# Altium PCB kernel.PcbDoc (part 1 of 7)
Units mil, origin at the board's own origin, x right, y up, seen from the top; angles counter-clockwise.
Board outline 2360 x 2450.34 mil, 6 copper layers (Top Layer, GND, SIGNAL, POWER, GND1, Bottom Layer), stack 32.112 mil thick; 150 components, 174 nets, 684 pads, 710 vias.
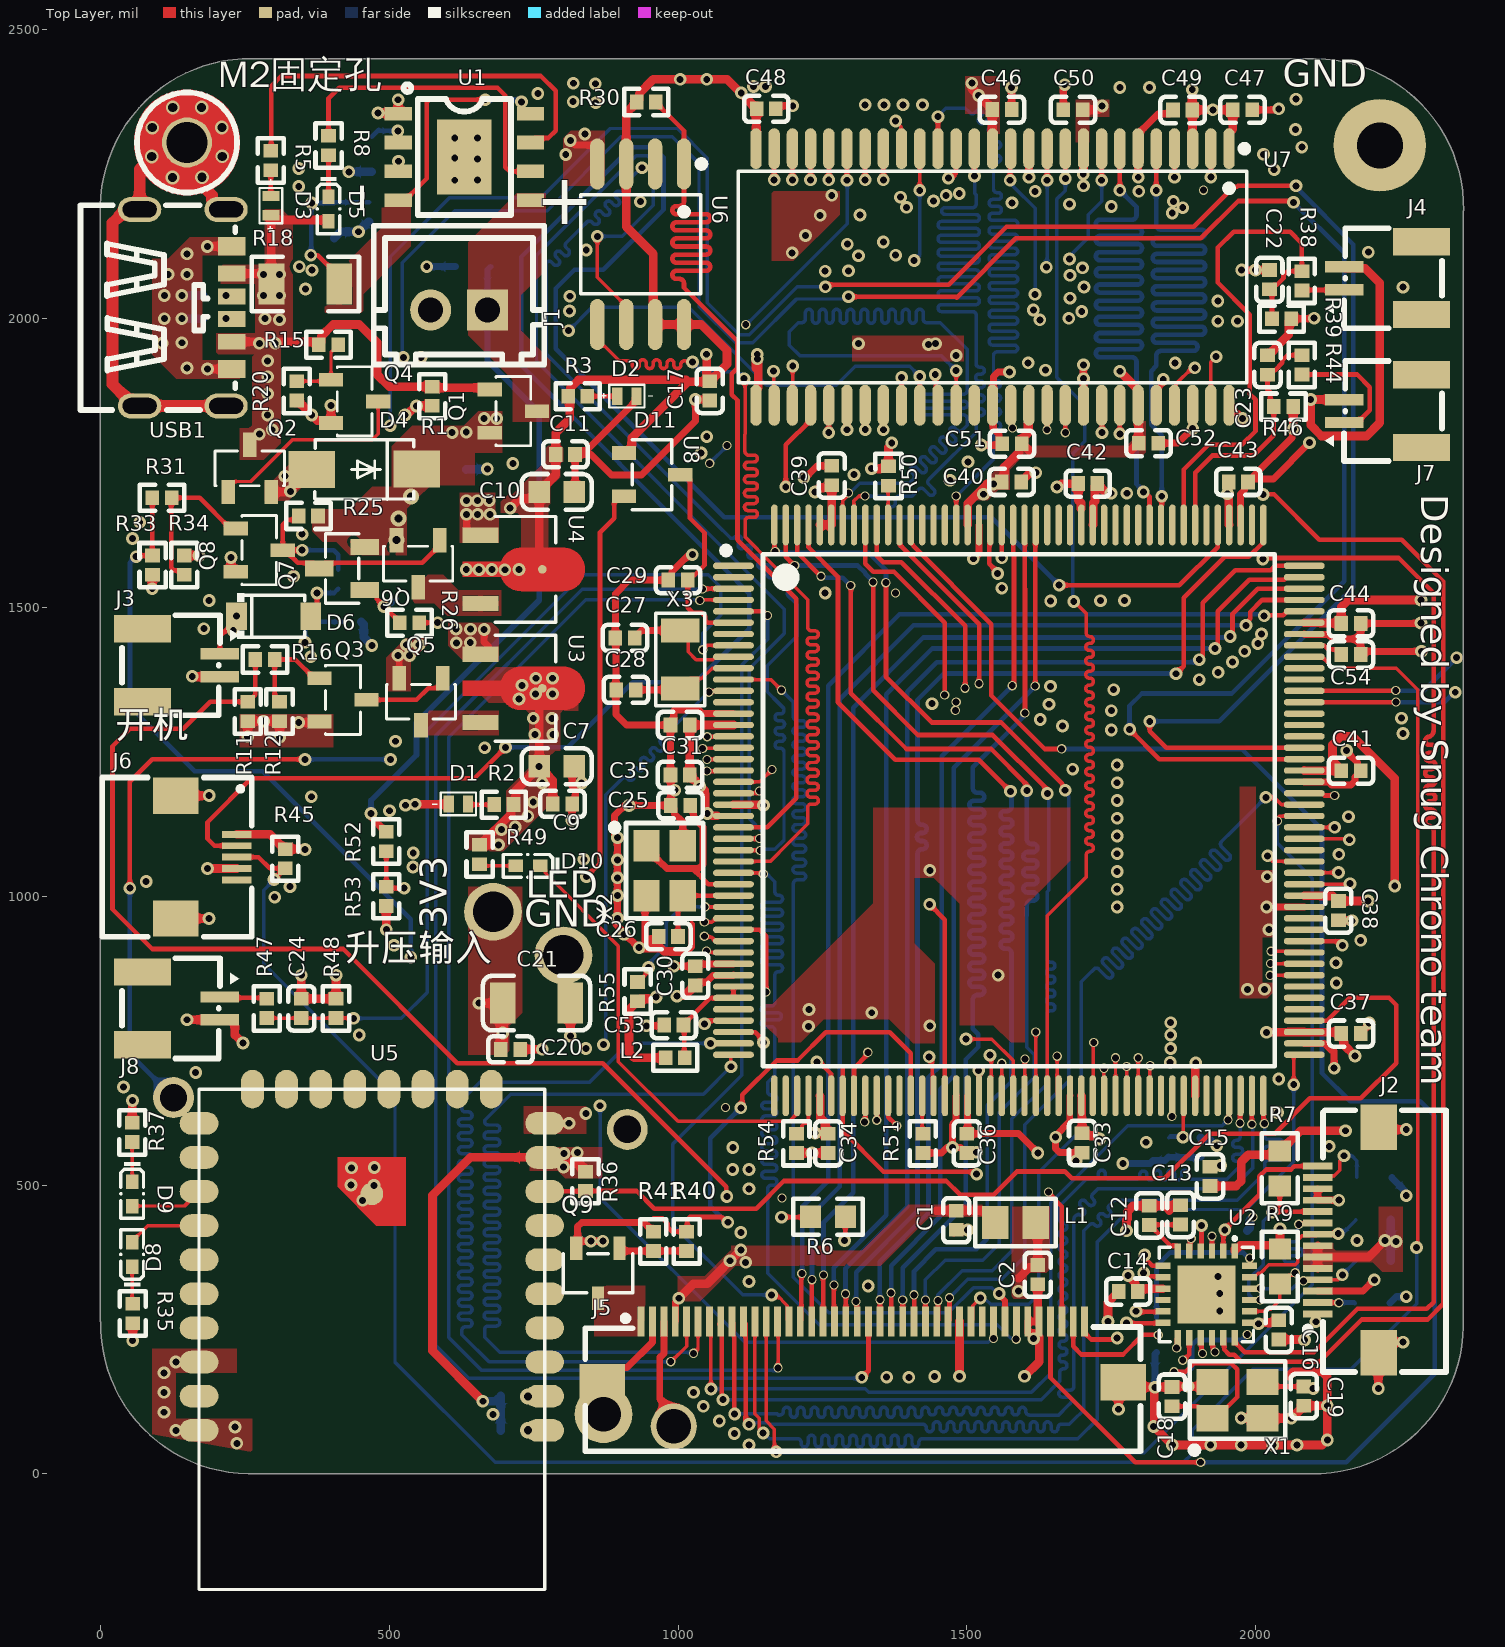
[diagram p0: Top Layer view]
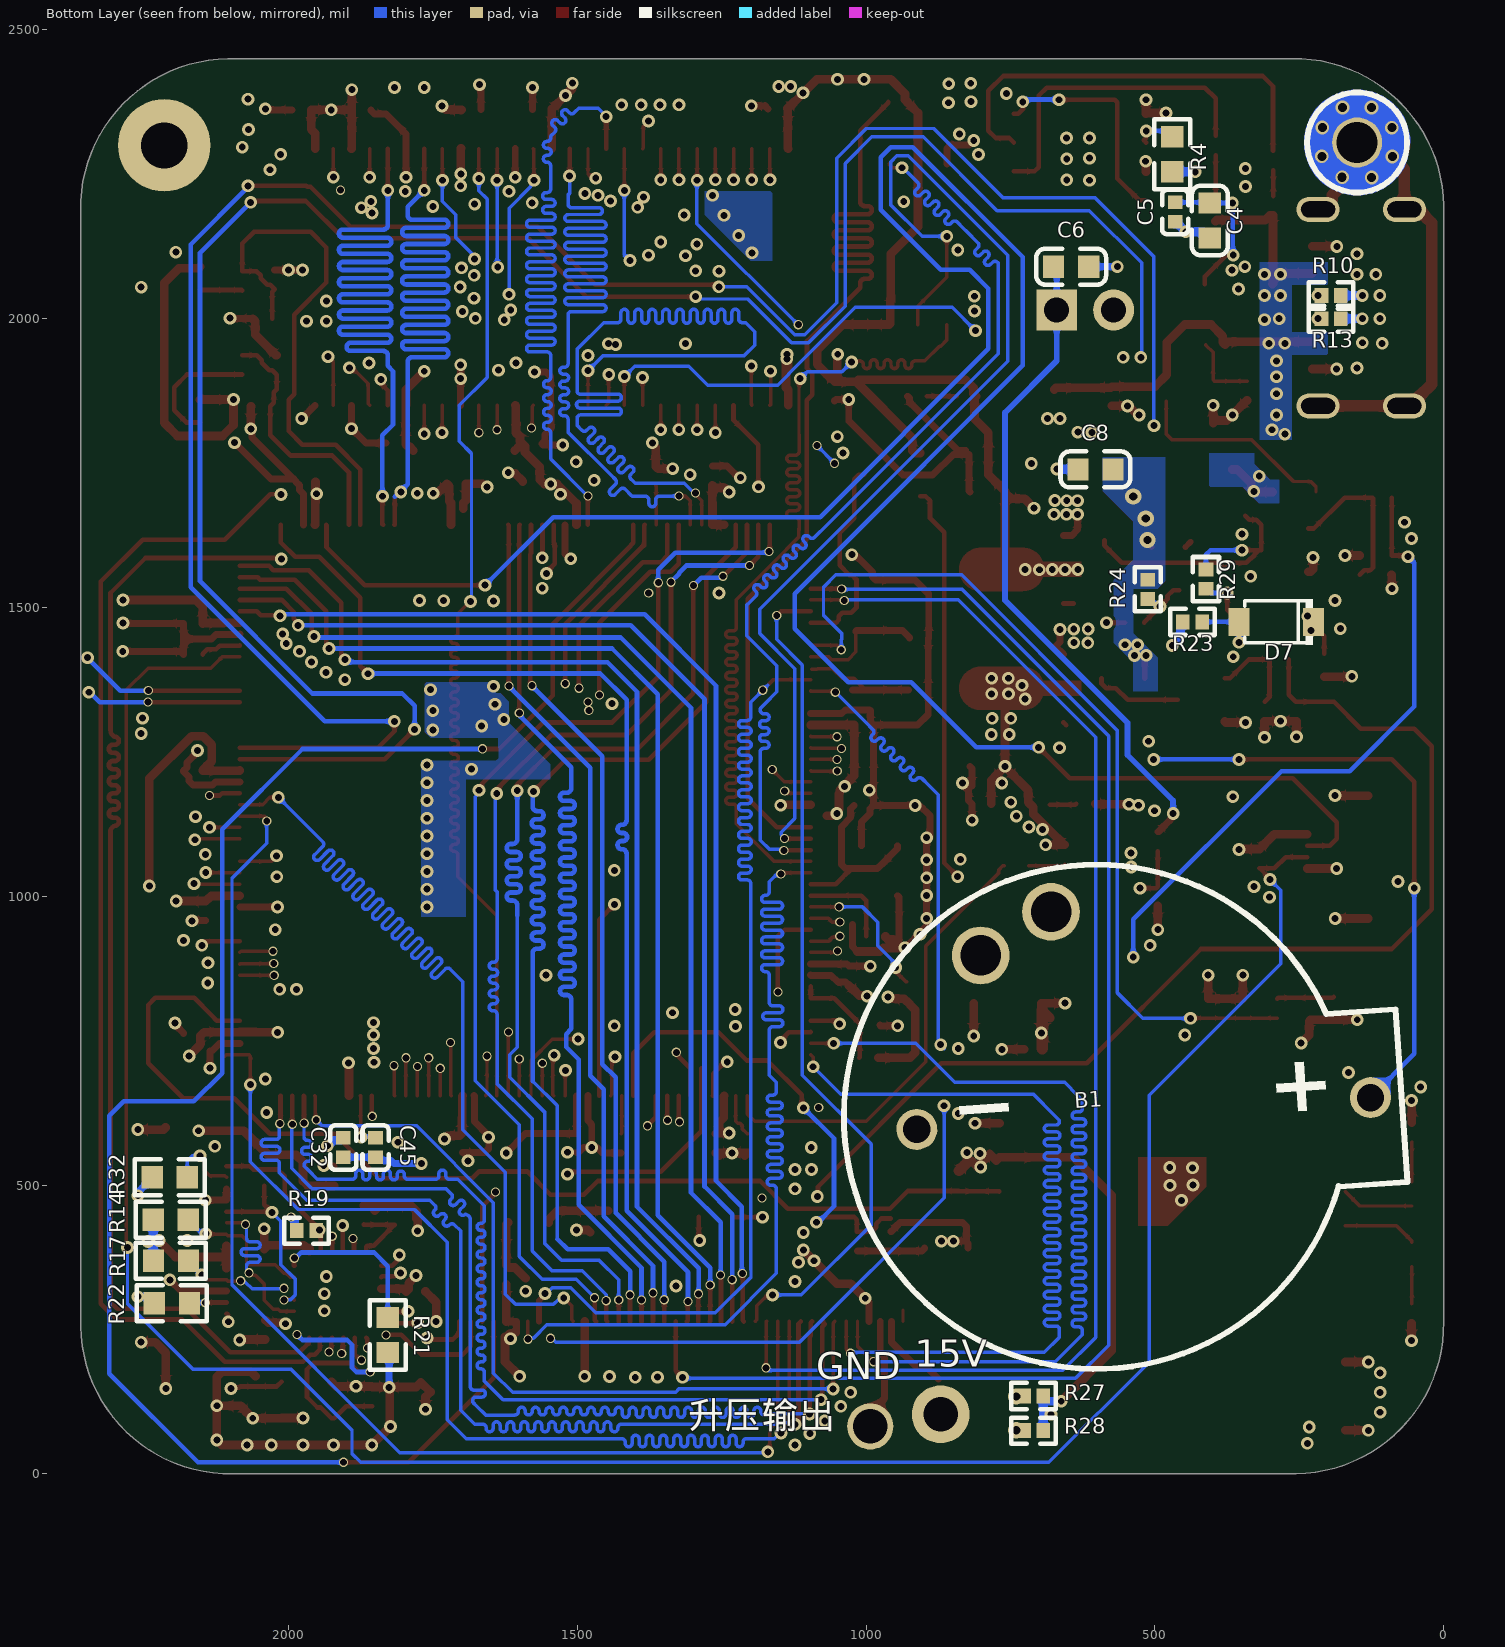
[diagram p1: Bottom Layer view, seen from below]
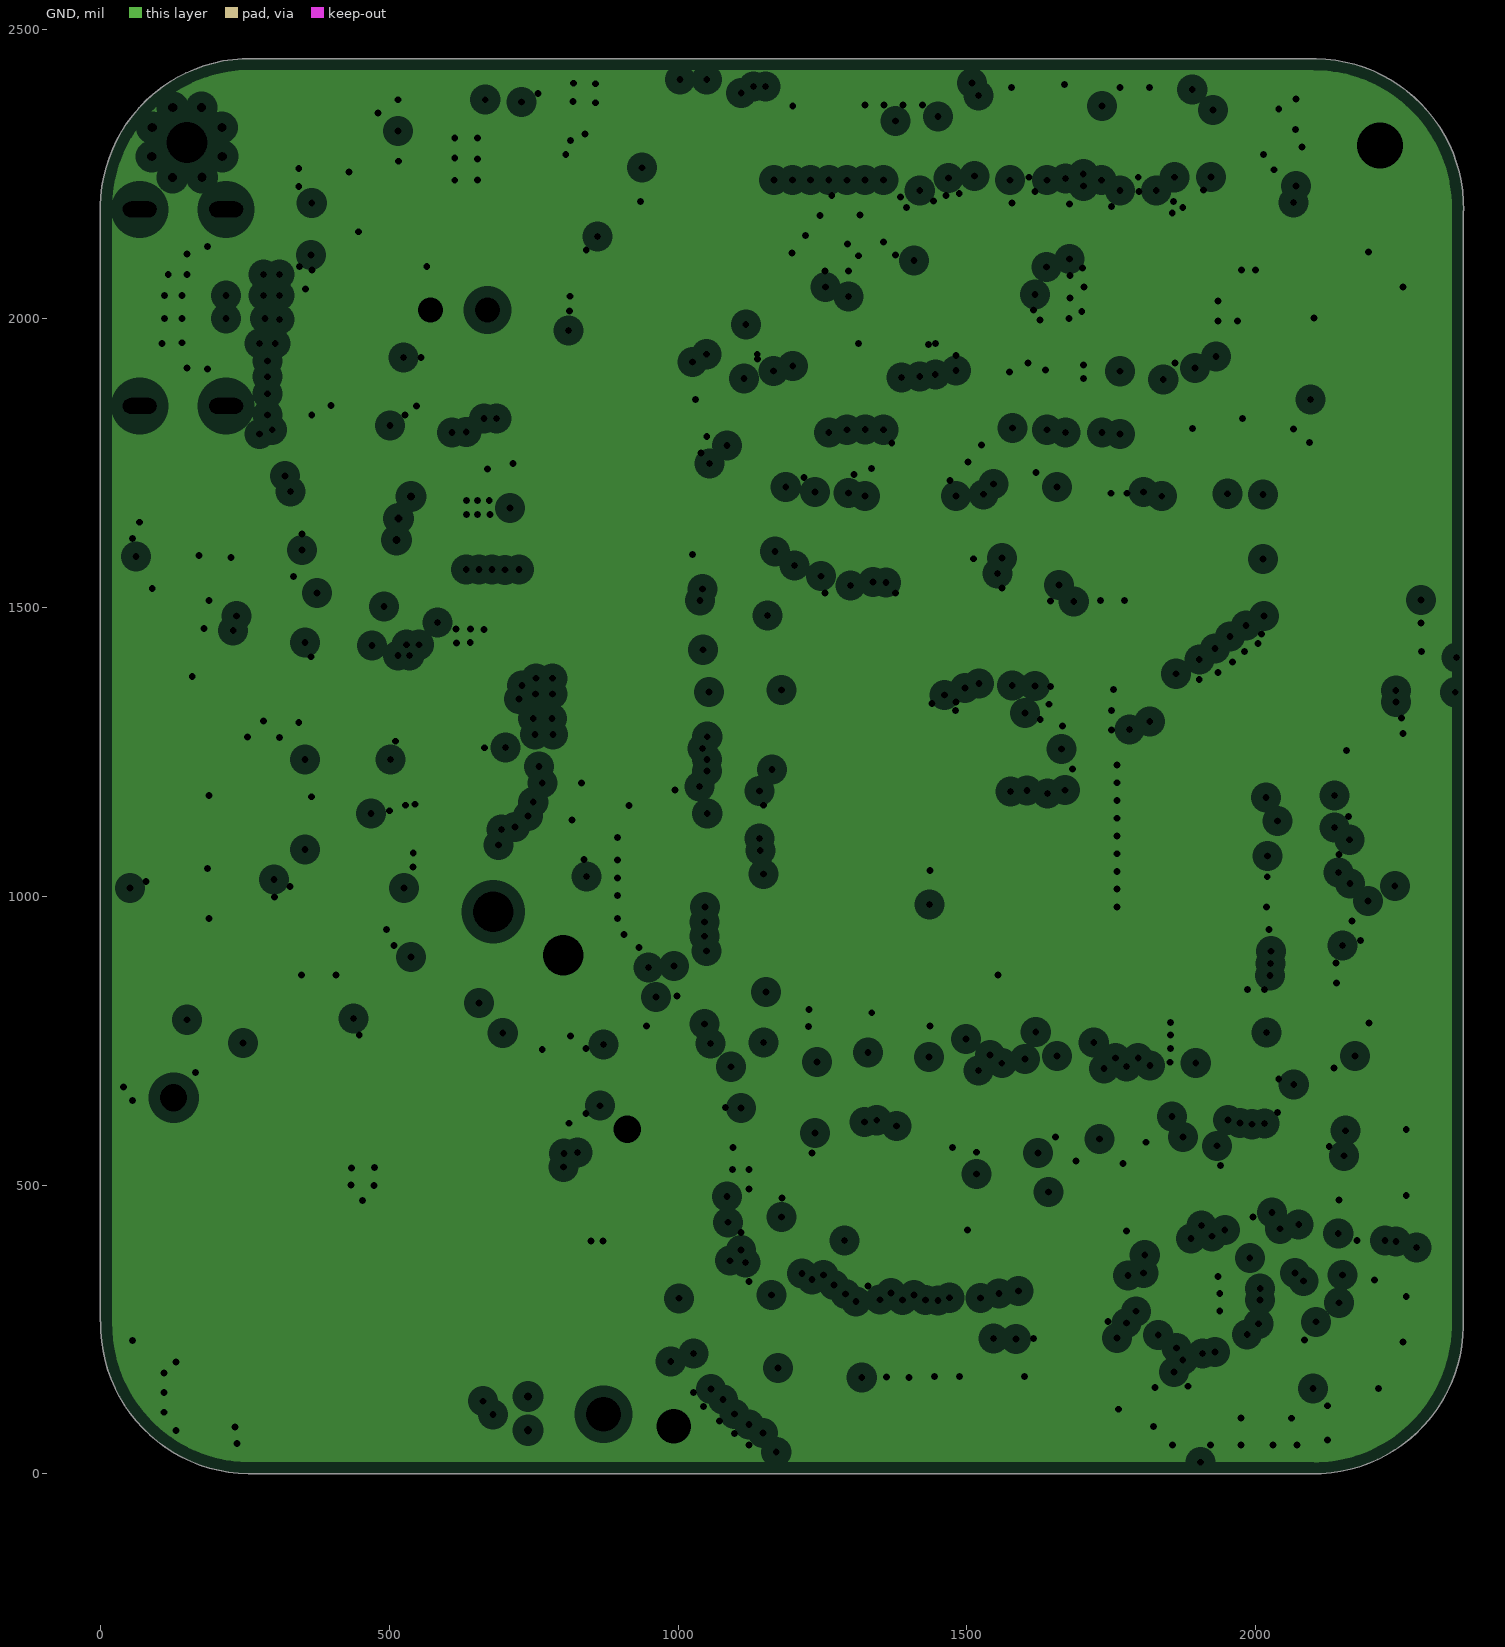
[diagram p2: GND, clearances drawn from the general rule]
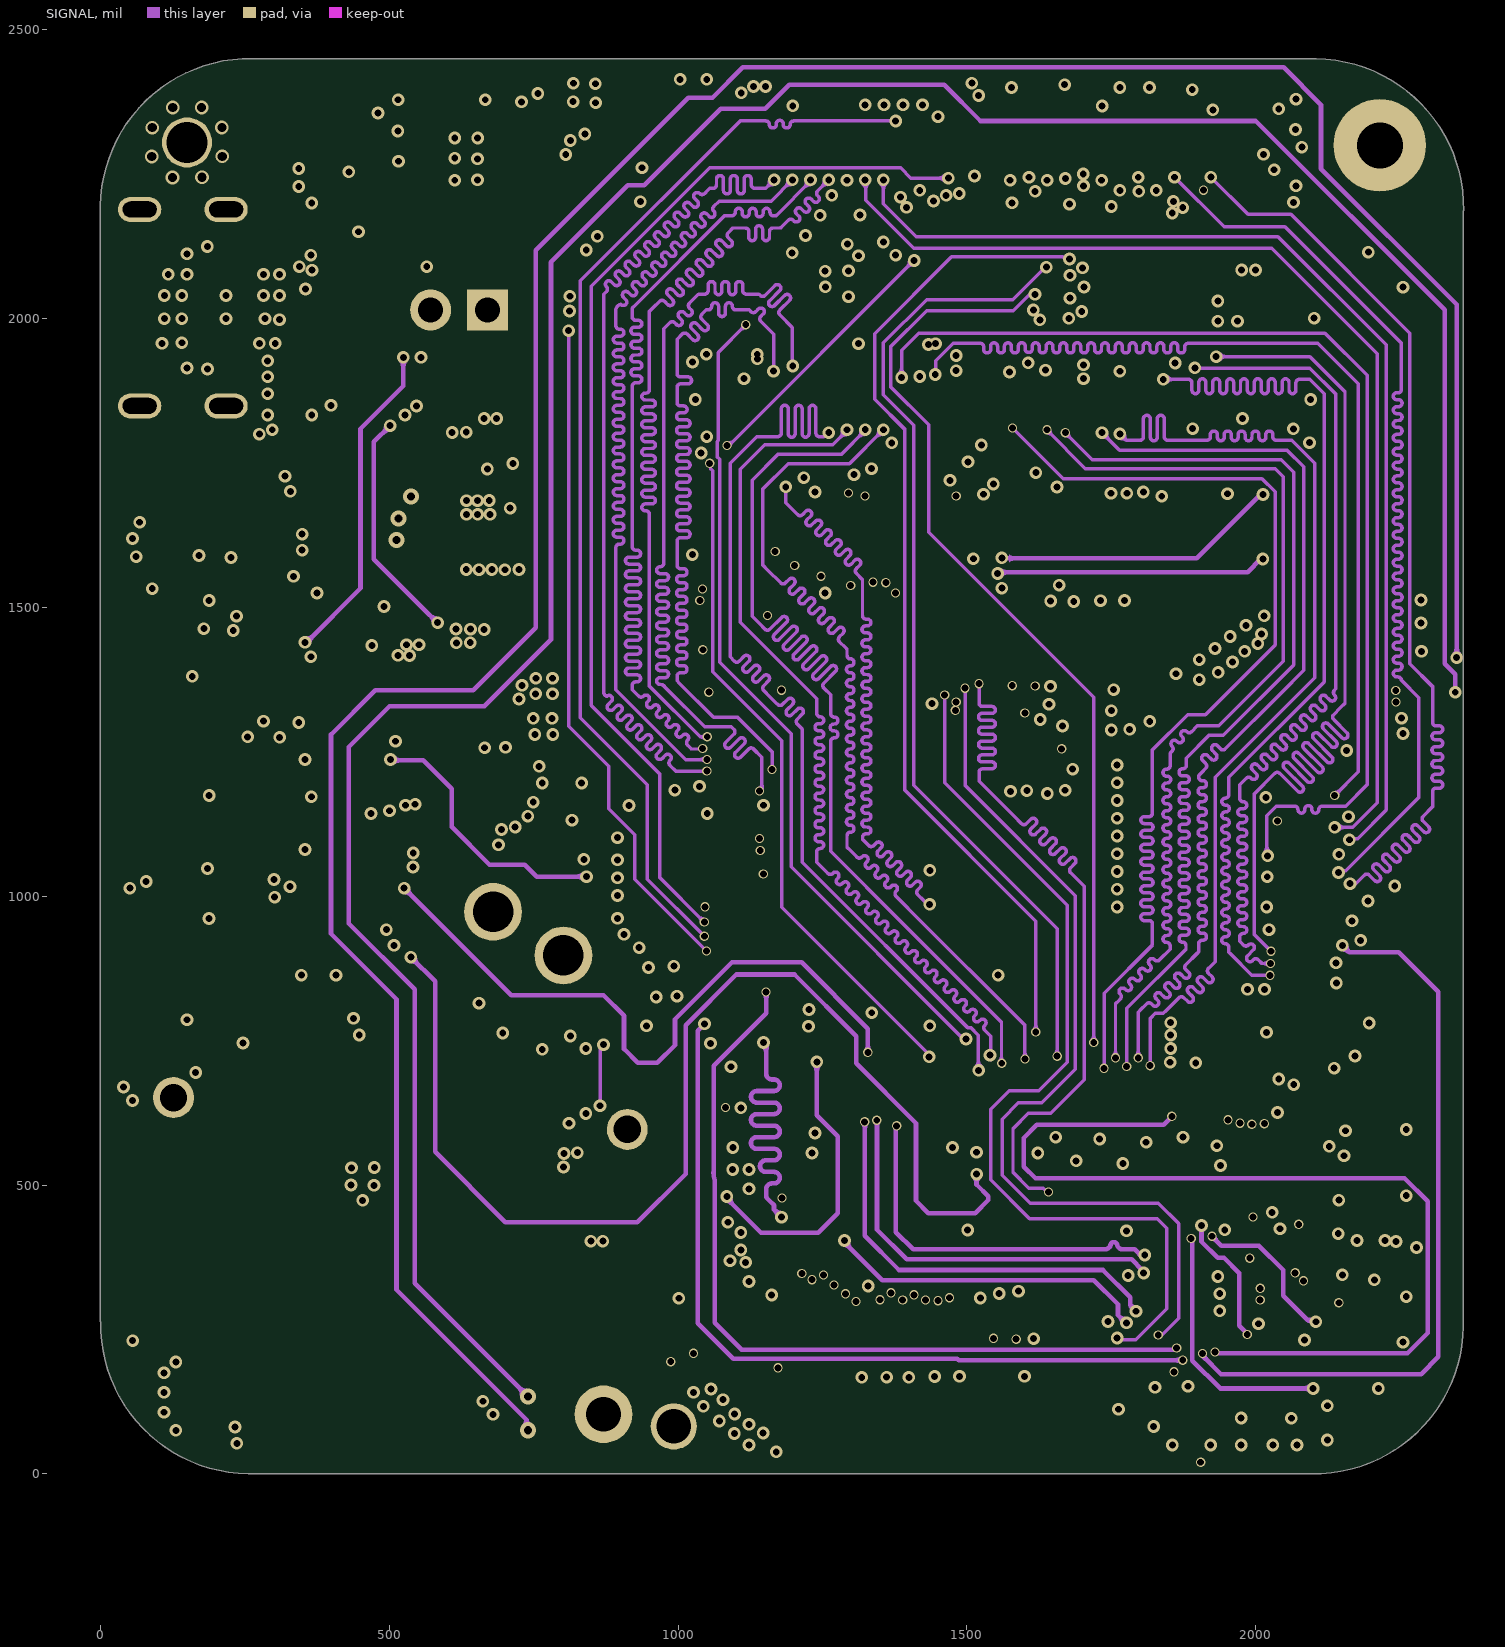
[diagram p3: SIGNAL]
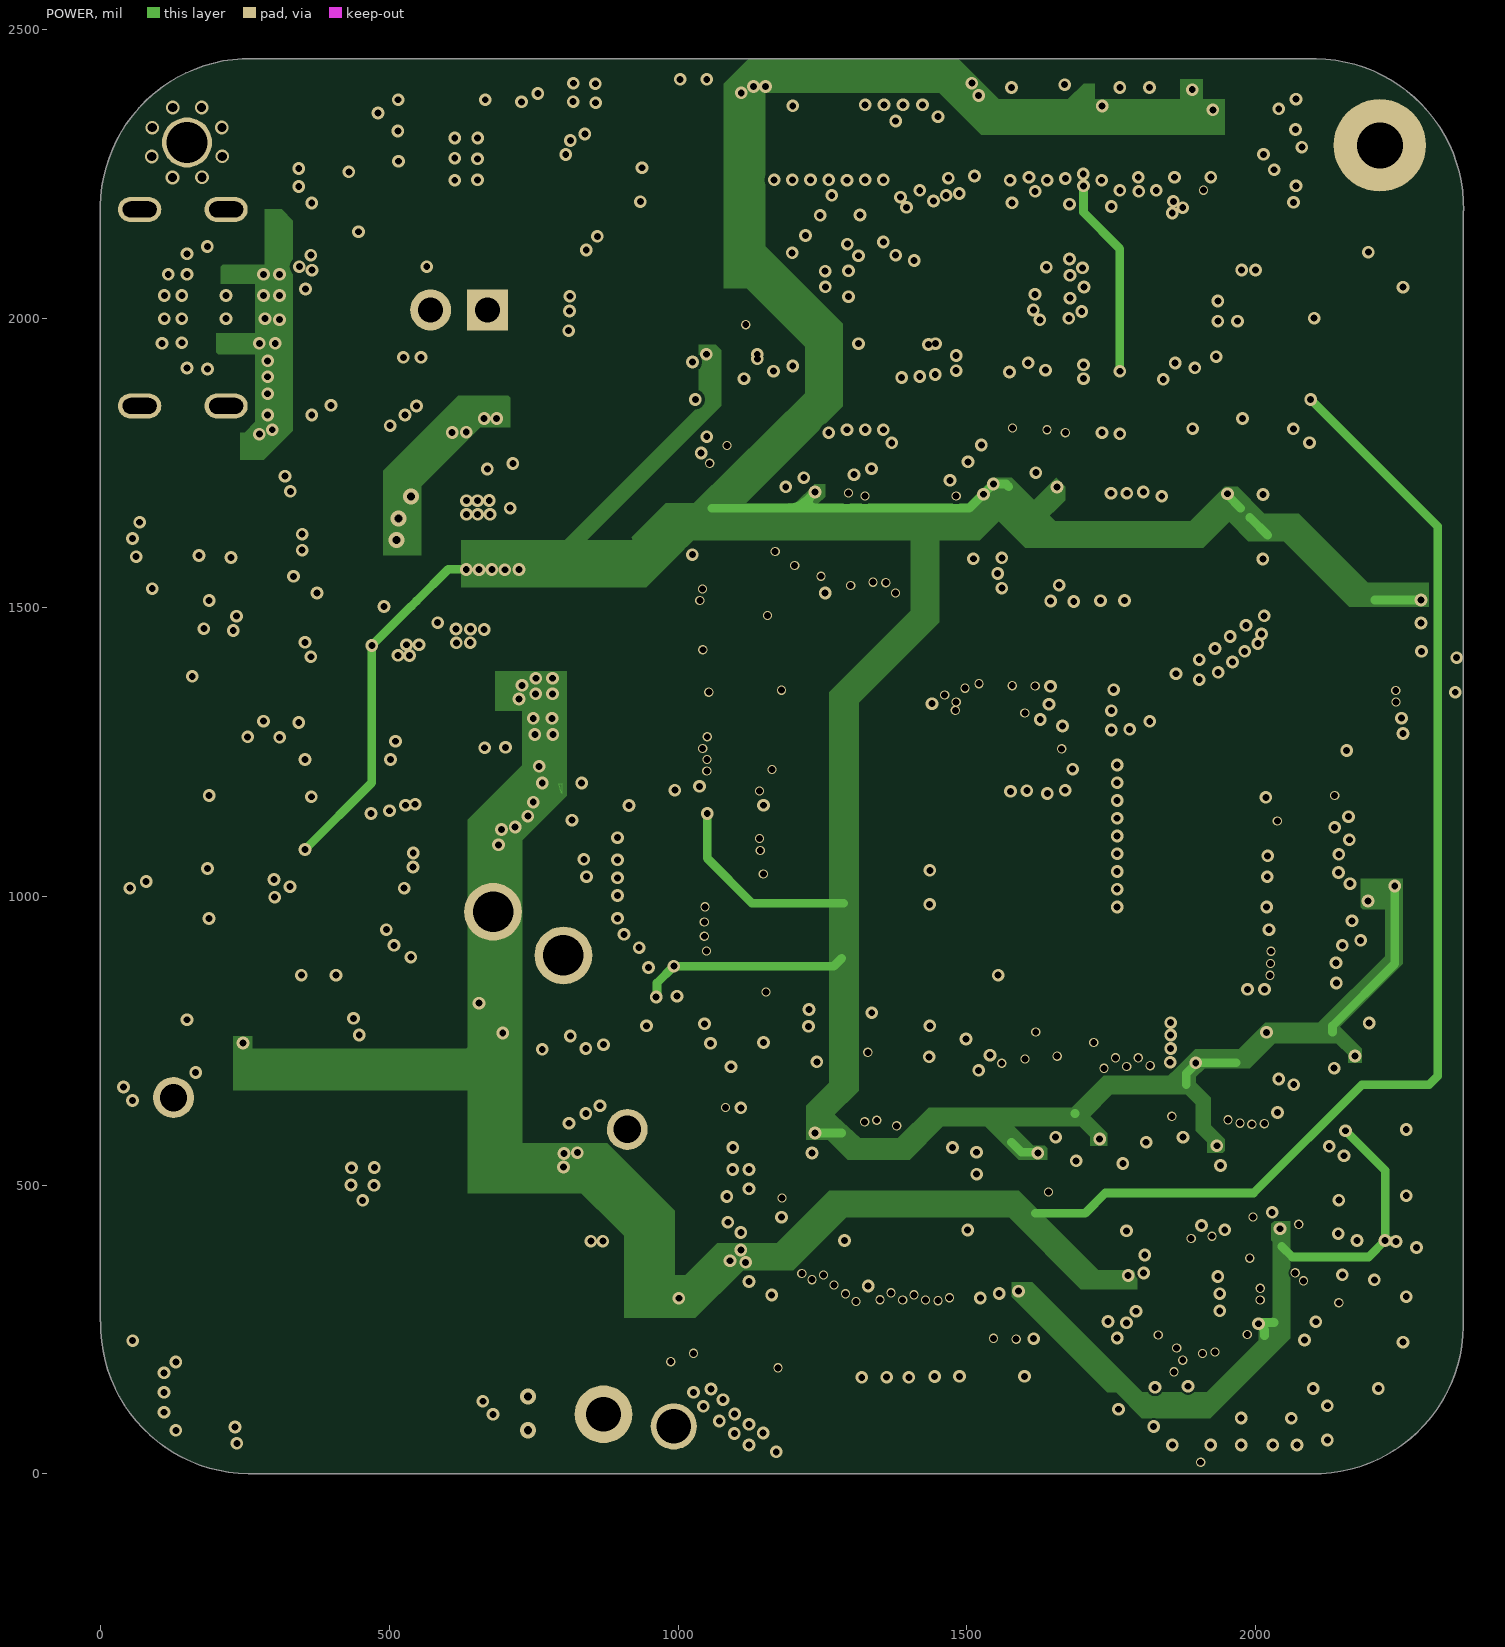
[diagram p4: POWER]
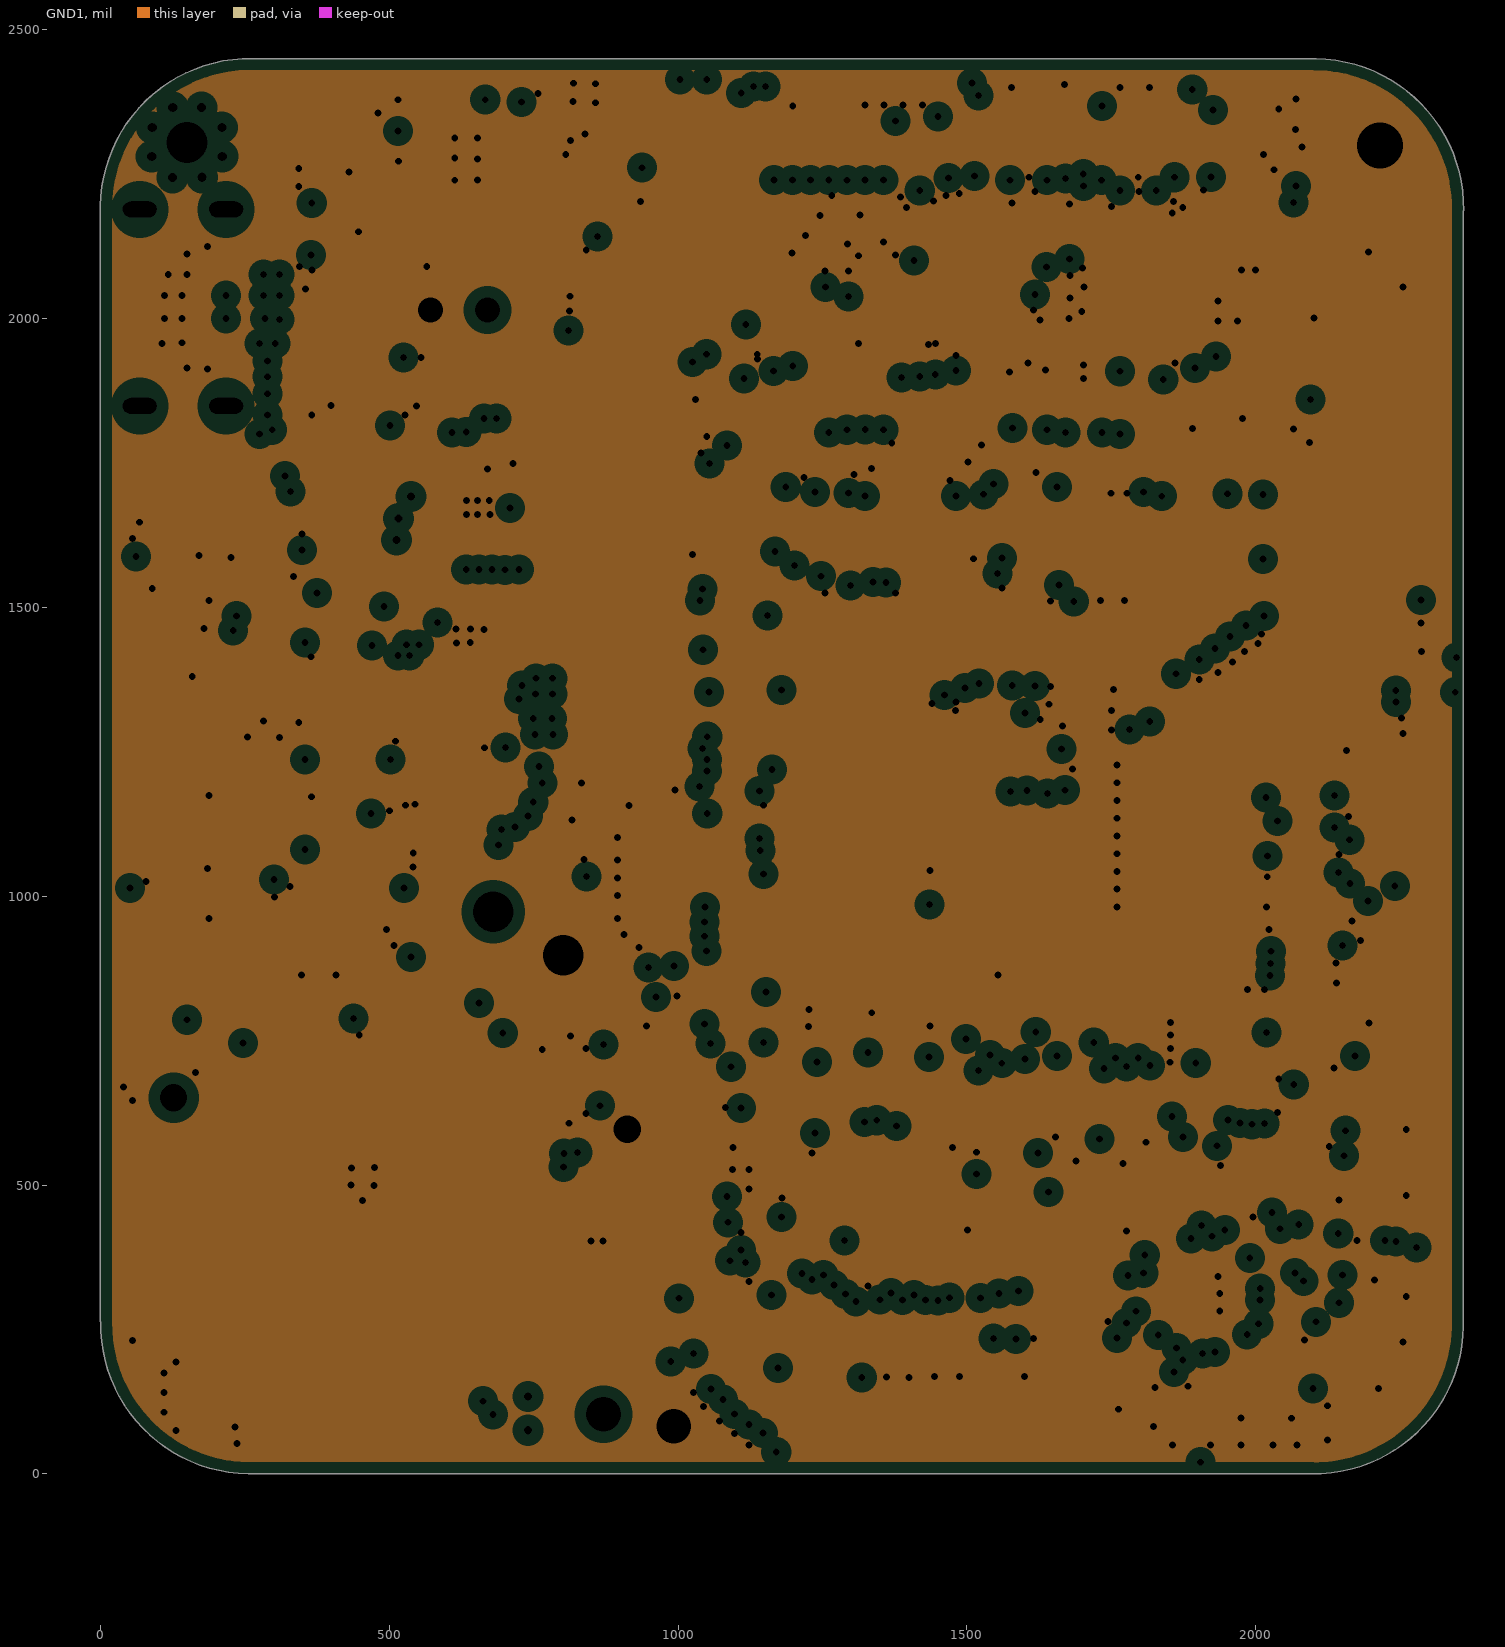
[diagram p5: GND1, clearances drawn from the general rule]
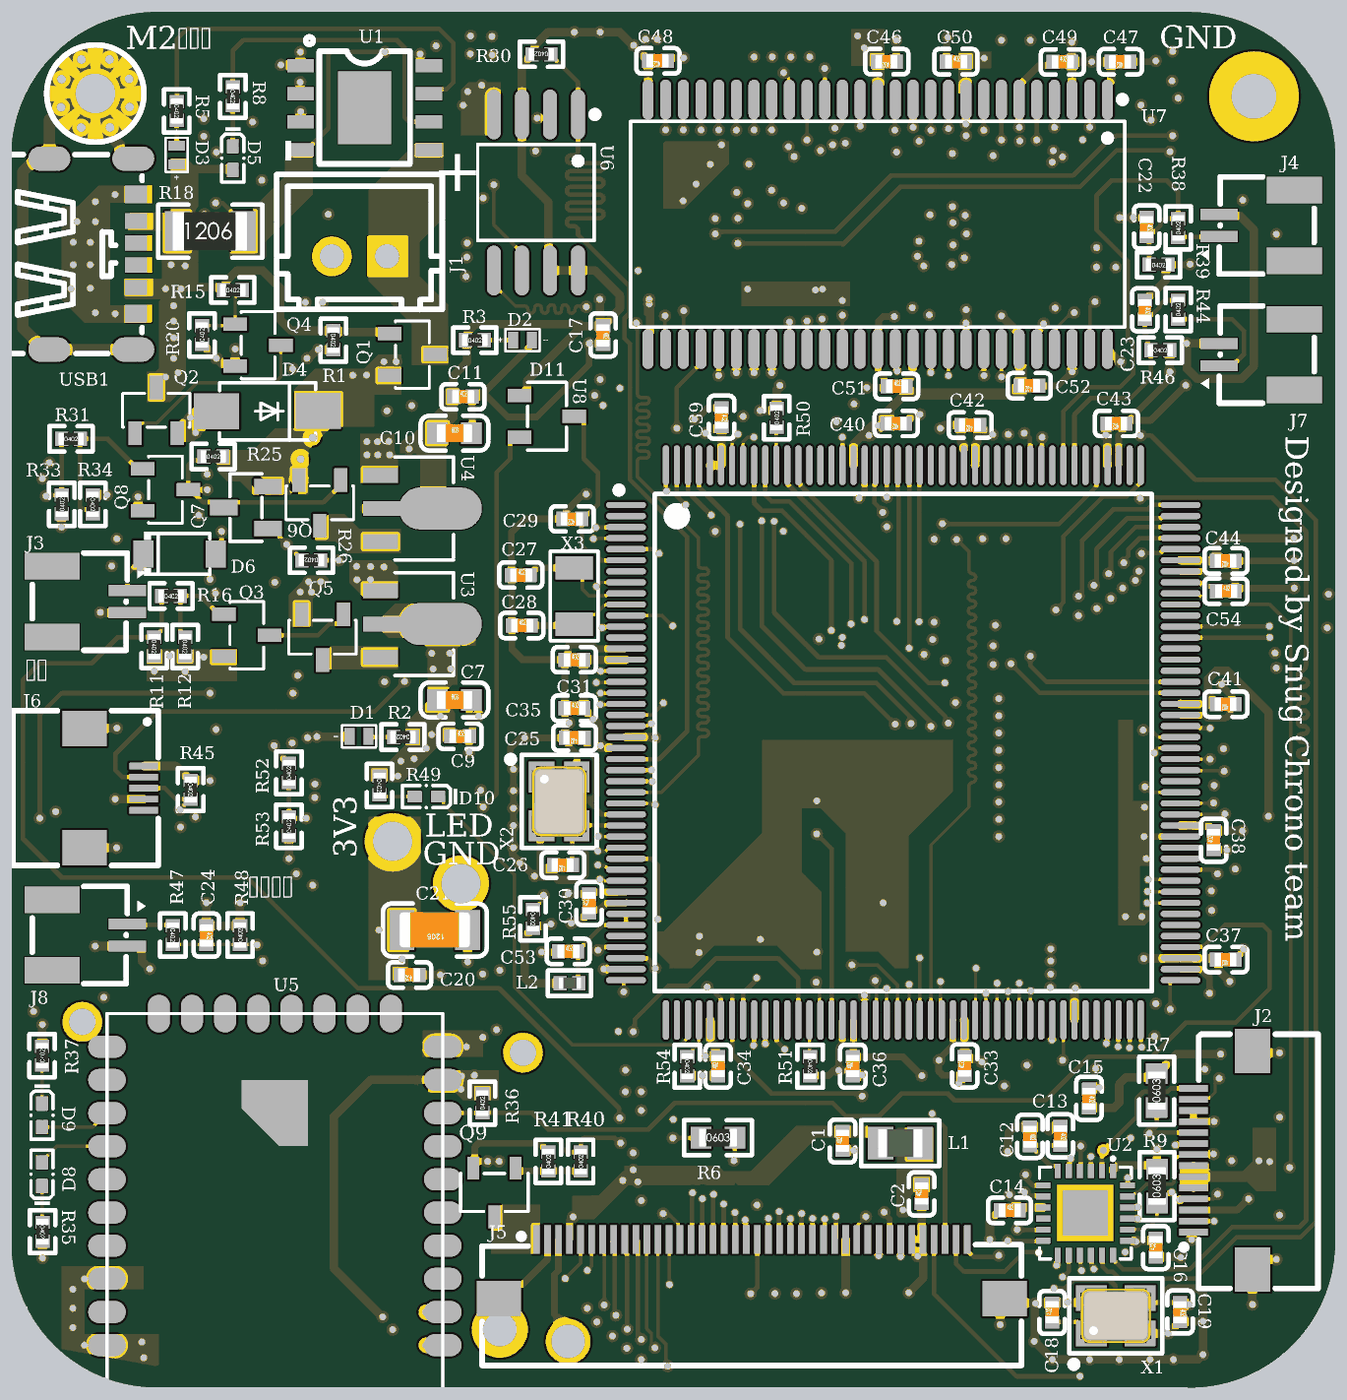
[diagram p11: 3D render of the assembled board from above, using the file's embedded part models]
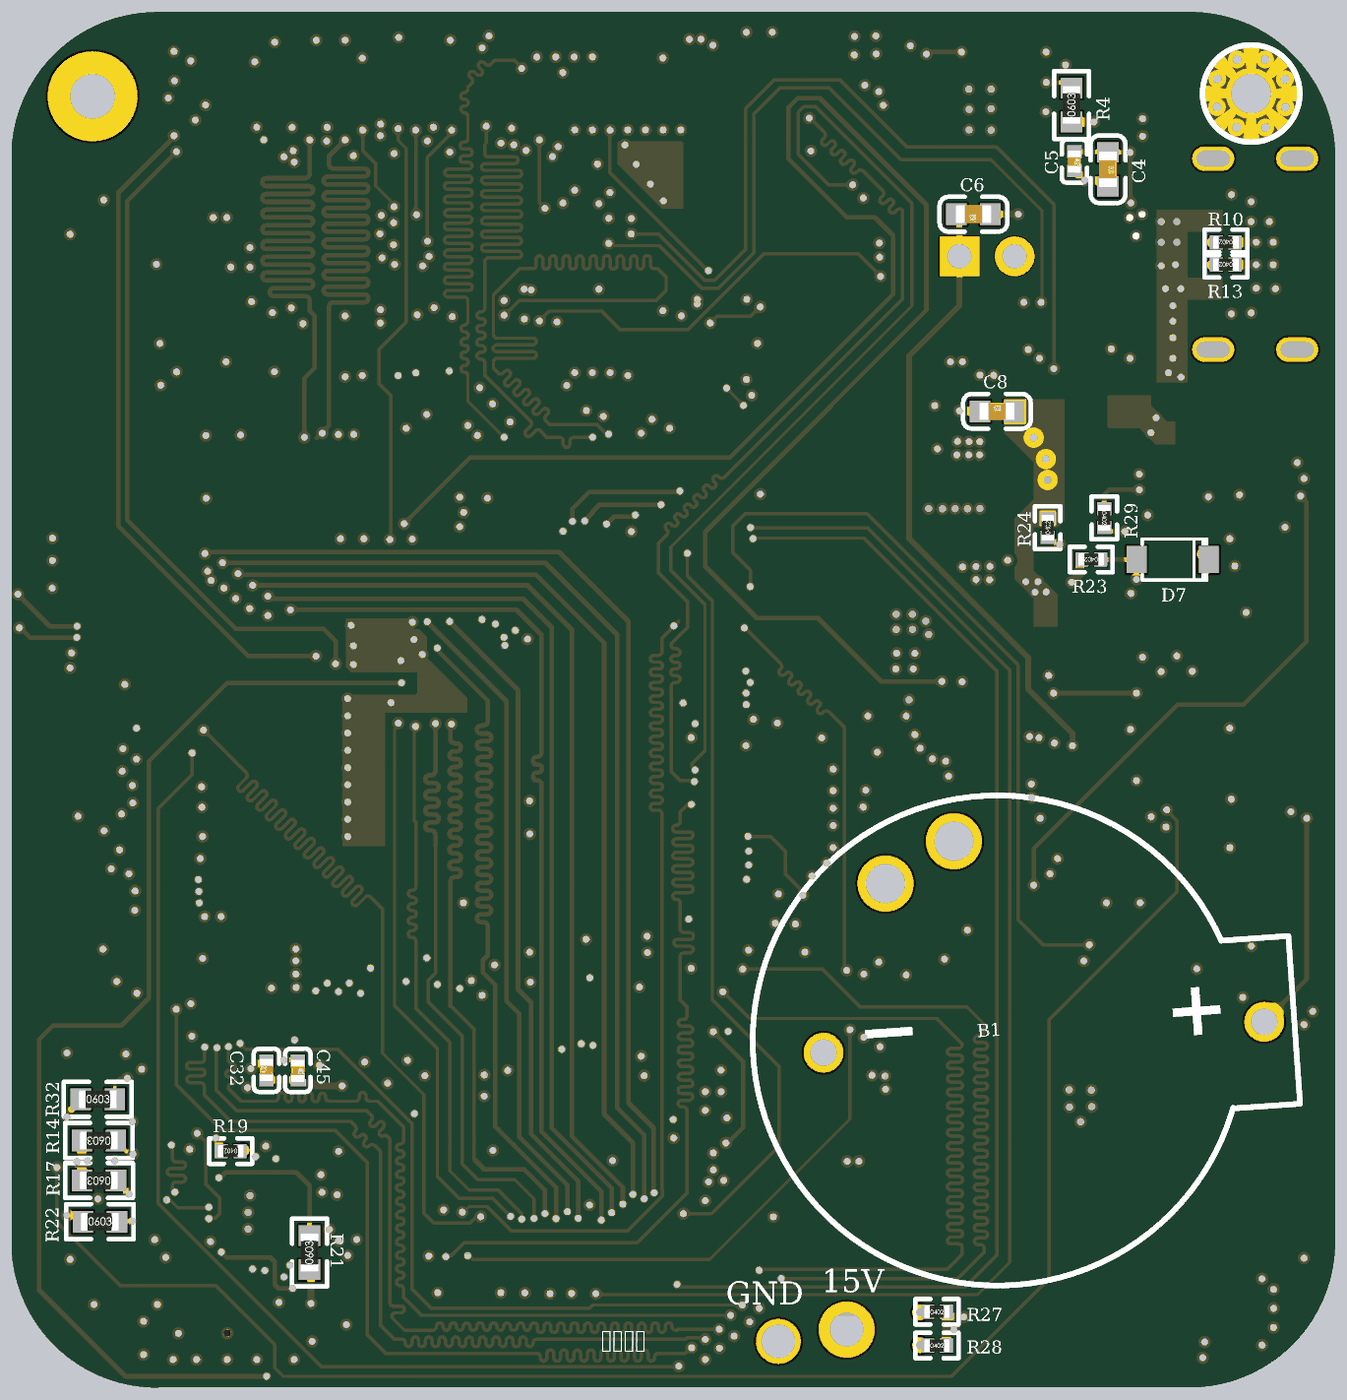
[diagram p12: 3D render of the assembled board from below, using the file's embedded part models]

## Layer stack, top to bottom
Top Solder: solder mask 0.4, Solder Resist, Dk 3.5
Top Layer: signal copper 1.4
Dielectric 2: prepreg 2.8, PP-006, Dk 4.1
GND: plane copper 1.378, net GND
Dielectric 4: prepreg 2.8, PP-006, Dk 4.1
SIGNAL: signal copper 1.378
Dielectric 1: dielectric 12.6, FR-4, Dk 4.8
POWER: signal copper 1.378
Dielectric 5: prepreg 2.8, PP-006, Dk 4.1
GND1: plane copper 1.378, net GND
Dielectric 3: prepreg 2.8, PP-006, Dk 4.1
Bottom Layer: signal copper 1.4
Bottom Solder: solder mask 0.4, Solder Resist, Dk 3.5

## Board outline
255.68,0.34 cw(c259.49,259.49) 0.34,263.3 0,263.64 0,2195 cw(c259.15,2191.19) 262.96,2450.34 2104.32,2450.34 2104.66,2450 cw(c2100.85,2190.85) 2360,2187.04 2359.66,2186.7 2359.66,255.34 cw(c2100.51,259.15) 2096.7,0 2096.36,0.34

## Design rules (kind name [scope] priority, off if disabled: settings)
Clearance [All] p1: gap=4 ignorepadtopadclearanceinfootprint=FALSE
MatchedLengths SDRAM [InNetClass('All Nets')] p1: tolerance=20 checknetsindiffpair=FALSE checkdiffpairvsdiffpair=TRUE checkxsignals=TRUE checkothers=TRUE
MatchedLengths ETHER [InNetClass('ETHER')] p2: tolerance=50 checknetsindiffpair=FALSE checkdiffpairvsdiffpair=TRUE checkxsignals=TRUE checkothers=TRUE
MatchedLengths LCD [InNetClass('LCD')] p3: tolerance=50 checknetsindiffpair=FALSE checkdiffpairvsdiffpair=TRUE checkxsignals=TRUE checkothers=TRUE
PlaneClearance [All] p1: clearance=20
PlaneConnect [InNetClass('地')] p1: planeconnectstyle=Direct reliefexpansion=20 reliefentries=4 reliefconductorwidth=10 reliefairgap=10
PolygonConnect PolygonConnect_1 [InNetClass('电源') vs InNetClass('电源')] p1: connectstyle=Direct reliefconductorwidth=10 reliefentries=4 polygonreliefangle="90 Angle" airgapwidth=10
PolygonConnect [InNetClass('电源')] p2: connectstyle=Direct reliefconductorwidth=10 reliefentries=4 polygonreliefangle="90 Angle" airgapwidth=10
RoutingVias [All] p1: holewidth=28 width=50 viastyle="Through Hole" minholewidth=28 minwidth=50 maxholewidth=28 maxwidth=50
SolderMaskExpansion [All] p1: expansion=4 istentingtop=FALSE
Width [InNetClass('地')] p1: maxlimit=15 minlimit=12 preferedwidth=15
Width 电源 [InNetClass('电源')] p2: maxlimit=15 minlimit=10 preferedwidth=12
Width 高速信号 [InNetClass('高速信号')] p3: maxlimit=8 minlimit=6 preferedwidth=6
Width 信号 [InNetClass('低速信号')] p4: maxlimit=8 minlimit=6 preferedwidth=6
28 further rules are at their usual default settings.

## Classes and differential pairs
net class 电子开关: POWER_DOWN POWER_M POWER_MM POWER_P
net class Wi-Fi: WIFI_R WIFI_RST WIFI_T
net class FLASH: MISO MOSI SCK SPI_CS
net class 中间信号层: ETH_MDC ETH_MDIO ETH_RESET FMC_A0 FMC_A1 FMC_A2 FMC_A3 FMC_A4 FMC_A5 FMC_A6 FMC_A7 FMC_A8 FMC_A9 FMC_A10 FMC_A11 FMC_A12 FMC_BA0 FMC_BA1 FMC_D0 FMC_D1 FMC_D2 FMC_D3 FMC_D4 FMC_D5 FMC_D6 FMC_D7 FMC_D8 FMC_D9 FMC_D10 FMC_D11 FMC_D12 FMC_D13 FMC_D14 FMC_D15 FMC_NBL0 FMC_NBL1 FMC_SDCKE0 FMC_SDCLK FMC_SDNCAS FMC_SDNE0 FMC_SDNRAS FMC_SDNWE NetR6_2 RMII_CRS_DV RMII_REF_CLK RMII_RXD0 RMII_RXD1 RMII_TX_EN RMII_TXD0 RMII_TXD1 TPRX_N TPRX_P TPTX_N TPTX_P
net class 地: GND
net class LCD: B0 B1 B2 B3 B4 B5 B6 B7 CLK CS DEN G0 G1 G2 G3 G4 G5 G6 G7 HSYNC R0 R1 R2 R3 R4 R5 R6 R7 SCL SDA VSYNC
net class ETHER: ETH_MDC ETH_MDIO ETH_RESET NetR6_2 RMII_CRS_DV RMII_REF_CLK RMII_RXD0 RMII_RXD1 RMII_TX_EN RMII_TXD0 RMII_TXD1 TPRX_N TPRX_P TPTX_N TPTX_P
net class SDRAM: FMC_A0 FMC_A1 FMC_A2 FMC_A3 FMC_A4 FMC_A5 FMC_A6 FMC_A7 FMC_A8 FMC_A9 FMC_A10 FMC_A11 FMC_A12 FMC_BA0 FMC_BA1 FMC_D0 FMC_D1 FMC_D2 FMC_D3 FMC_D4 FMC_D5 FMC_D6 FMC_D7 FMC_D8 FMC_D9 FMC_D10 FMC_D11 FMC_D12 FMC_D13 FMC_D14 FMC_D15 FMC_NBL0 FMC_NBL1 FMC_SDCKE0 FMC_SDCLK FMC_SDNCAS FMC_SDNE0 FMC_SDNRAS FMC_SDNWE
net class 低速信号: 15V BAT_VOL BOOT0 BOOT1 CLK CS KEY0 KEY1 KEY2 LCD_RST LED LINK LINKA LINKK MISO MOSI NetB1_2 NetC4_1 NetC12_2 NetC18_1 NetC19_1 NetC29_1 NetC45_1 NetC53_2 NetC54_1 NetC100_2 NetC101_2 NetC102_2 NetD1_2 NetD2_2 NetD3_1 NetD5_1 NetD6_1 NetD8_1 NetD8_2 NetD9_1 NetD9_2 NetD10_2 NetJ2_2 NetJ2_13 NetJ4_1 NetJ5_1 NetJ7_1 NetJ8_1 NetQ2_1 NetQ3_1 NetQ3_3 NetQ4_1 NetQ5_3 NetQ6_1 NetQ6_3 NetQ7_1 NetQ8_1 NetR4_2 NetR5_1 NetR6_2 NetR8_1 NetR10_2 NetR13_2 NetR21_2 NetR54_1 NetR55_1 POWER_DOWN POWER_M POWER_MM POWER_P SPEED SPEEDA SPEEDK SPI_CS SWDCLK SWDIO WIFI_R WIFI_RST WIFI_T
net class 高速信号: B0 B1 B2 B3 B4 B5 B6 B7 CLK DEN ETH_MDC ETH_MDIO ETH_RESET FMC_A0 FMC_A1 FMC_A2 FMC_A3 FMC_A4 FMC_A5 FMC_A6 FMC_A7 FMC_A8 FMC_A9 FMC_A10 FMC_A11 FMC_A12 FMC_BA0 FMC_BA1 FMC_D0 FMC_D1 FMC_D2 FMC_D3 FMC_D4 FMC_D5 FMC_D6 FMC_D7 FMC_D8 FMC_D9 FMC_D10 FMC_D11 FMC_D12 FMC_D13 FMC_D14 FMC_D15 FMC_NBL0 FMC_NBL1 FMC_SDCKE0 FMC_SDCLK FMC_SDNCAS FMC_SDNE0 FMC_SDNRAS FMC_SDNWE G0 G1 G2 G3 G4 G5 G6 G7 HSYNC R0 R1 R2 R3 R4 R5 R6 R7 RMII_CRS_DV RMII_REF_CLK RMII_RXD0 RMII_RXD1 RMII_TX_EN RMII_TXD0 RMII_TXD1 TPRX_N TPRX_P TPTX_N TPTX_P VSYNC
component class kernel_RJ45: C100 C101 C102 J100 J101
net class 外设电源: VCCP
net class 电源: 15V GND NetD4_1 VBAT VBUS VCCEA VCCM VCCP VUSB

## Components (designator, comment, footprint, x,y, rotation, side; value= is the part's Value field where it differs from the comment)
B1 "BS-02-A1AJ010" BAT-TH_BS-02-A1AJ010 519.47,623.98 r176 bottom
C1 "104" 0402_C 1481.73,439.16 r90 top value=20pF
C2 "104" 0402_C 1622.7,344.85 r90 top value=20pF
C4 "106" 0603_C 405,2170 r270 bottom value=10uF
C5 "104" 0402_C 465,2184.57 r270 bottom value=20pF
C6 "106" 0603_C 645,2090 r0 bottom value=10uF
C7 "106" 0603_C 790,1225 r0 top value=10uF
C8 "106" 0603_C 603.07,1738.97 r180 bottom value=10uF
C9 "104" 0402_C 800,1160 r0 top value=20pF
C10 "106" 0603_C 790,1700 r0 top value=10uF
C11 "104" 0402_C 805,1765 r0 top value=20pF
C12 "105" 0402_C 1815.75,447.61 r270 top value=20pF
C13 "471" 0402_C 1869.87,448.44 r270 top value=470pF
C14 "104" 0402_C 1779.4,315.68 r0 top value=20pF
C15 "104" 0402_C 1921.02,515.13 r270 top value=20pF
C16 "104" 0402_C 2040.08,249.4 r90 top value=20pF
C17 "104" 0402_C 1055,1875 r270 top value=20pF
C18 "200" 0402_C 1855.17,133.77 r90 top value=20pF
C19 "200" 0402_C 2083.38,134.71 r270 top value=20pF
C20 "104" 0402_C 710,735 r180 top value=20pF
C21 "107" 1206_C 755,815 r180 top value=100uF
C22 "105" 0402_C 2023.85,2067.38 r270 top value=20pF
C23 "105" 0402_C 2020.48,1919.73 r270 top value=20pF
C24 "105" 0402_C 347.9,805.99 r270 top value=20pF
C25 "200" 0402_C 1004.33,1157.31 r180 top value=20pF
C26 "200" 0402_C 983.27,930.59 r180 top value=20pF
C27 "120" 0402_C 908.27,1447.36 r0 top value=20pF
C28 "120" 0402_C 910,1357.36 r0 top value=20pF
C29 "104" 0402_C 1000,1547.36 r180 top value=20pF
C30 "104" 0402_C 1030,862.36 r90 top value=20pF
C31 "104" 0402_C 1003.62,1296.5 r0 top value=20pF
C32 "104" 0402_C 1905,565 r90 bottom value=20pF
C33 "104" 0402_C 1699.46,572.93 r90 top value=20pF
C34 "104" 0402_C 1260,572.36 r90 top value=20pF
C35 "104" 0402_C 1003.62,1210.08 r0 top value=20pF
C36 "104" 0402_C 1500,572.36 r90 top value=20pF
C37 "104" 0402_C 2165,762.36 r180 top value=20pF
C38 "104" 0402_C 2143.18,975 r90 top value=20pF
C39 "104" 0402_C 1266.09,1728.34 r270 top value=20pF
C40 "104" 0402_C 1577.43,1717.36 r180 top value=20pF
C41 "104" 0402_C 2165,1217.36 r180 top value=20pF
C42 "104" 0402_C 1709.31,1714.4 r180 top value=20pF
C43 "104" 0402_C 1970,1717.36 r180 top value=20pF
C44 "104" 0402_C 2165,1472.36 r180 top value=20pF
C45 "225" 0402_C 1849.18,565.03 r270 bottom value=20pF
C46 "104" 0402_C 1560.69,2361.87 r180 top value=20pF
C47 "104" 0402_C 1977.12,2361.54 r180 top value=20pF
C48 "104" 0402_C 1152.75,2363.2 r180 top value=20pF
C49 "104" 0402_C 1873.51,2361.24 r0 top value=20pF
C50 "104" 0402_C 1683.77,2361.73 r0 top value=20pF
C51 "104" 0402_C 1578.16,1783.46 r0 top value=20pF
C52 "104" 0402_C 1814.57,1784.42 r180 top value=20pF
C53 "104" 0402_C 992.7,776.97 r0 top value=20pF
C54 "225" 0402_C 2165,1418.56 r0 top value=20pF
D1 "XL-1005SYGC" LED-SMD_L1.1-W0.6-FD 619.8,1160 r180 top
D2 "XL-1005SYGC" LED-SMD_L1.1-W0.6-FD 911.38,1865.7 r0 top
D3 "XL-1005SYGC" LED-SMD_L1.1-W0.6-FD 295,2195.64 r90 top
D4 "SS34" SMA_L4.3-W2.6-LS5.0-FD 456.62,1739.34 r0 top
D5 "XL-1005SURC" LED0402-RD 395,2189.94 r270 top
D6 "1N5819HW-7-F" SOD-123_L2.7-W1.6-LS3.7-RD 300,1485 r0 top
D7 "1N5819HW-7-F" SOD-123_L2.7-W1.6-LS3.7-RD 290,1475 r0 bottom
D8 "XL-1005SURC" LED0402-RD 55,380 r90 top
D9 "XL-1005SURC" LED0402-RD 55,485 r270 top
D10 "XL-1005UOC" LED0402-RD_ORANGE 740.02,1052.7 r180 top
D11 "BAT54C,215" SOT-23-3_L2.9-W1.6-P1.90-LS2.8-BR 955,1730 r180 top
J1 "ZX-XH2.54-2PZZ" CONN-TH_2P-P2.50_HX25003-2A 620.79,2015 r180 top
J2 "AFC01-S14FCA-00" FPC-SMD_AFC01-S14FCA-00 2160,405 r90 top
J3 "WAFER-SH1.0-2PWB" CONN-SMD_2P-P1.00_XUNPU_WAFER-SH1.0-2PWB 140,1400 r270 top
J4 "WAFER-SH1.0-2PWB" CONN-SMD_2P-P1.00_XUNPU_WAFER-SH1.0-2PWB 2220,2070 r90 top
J5 "AFC01-S40FCA-00" FPC-SMD_AFC01-S40FCA-00 1320,211.19 r0 top
J6 "AFC01-S05FCA-00" FPC-SMD_AFC01-S05FCA-00 183.39,1067.85 r270 top
J7 "WAFER-SH1.0-2PWB" CONN-SMD_2P-P1.00_XUNPU_WAFER-SH1.0-2PWB 2220,1840 r90 top
J8 "WAFER-SH1.0-2PWB" CONN-SMD_2P-P1.00_XUNPU_WAFER-SH1.0-2PWB 140,805.99 r270 top
L1 "BLM21PG221SN1D" 0805_L 1584.49,435.27 r0 top
L2 "BLM15AG100SN1D" 0402_L 995.19,720.34 r0 top
M2固定孔 "M2梅花焊盘" "PCBComponent_1 - duplicate" 150,2305 r0 top (schematic designator M1)
Q1 "HL6042" SOT-23-3_L2.9-W1.4-P1.90-LS2.5-BR 715,1840 r180 top
Q2 "HL6042" SOT-23-3_L2.9-W1.4-P1.90-LS2.5-BR 258.56,1740.75 r270 top
Q3 "MMBT3904-E" SOT-23-3_L2.9-W1.4-P1.90-LS2.5-BR 420,1340 r180 top
Q4 "MMBT3904-E" SOT-23-3_L2.9-W1.4-P1.90-LS2.5-BR 440,1856.68 r180 top
Q5 "HL6042" SOT-23-3_L2.9-W1.4-P1.90-LS2.5-BR 555,1336.69 r90 top
Q6 "HL6042" SOT-23-3_L2.9-W1.4-P1.90-LS2.5-BR 550,1575.9 r90 top
Q7 "MMBT3906" SOT-23-3_L2.9-W1.3-P1.90-LS2.4-BR 418.32,1567.48 r0 top
Q8 "MMBT3904-E" SOT-23-3_L2.9-W1.4-P1.90-LS2.5-BR 275,1599.27 r180 top
Q9 "S8050" SOT-23-3_L3.0-W1.7-P0.95-LS2.9-BR 861.22,347.52 r90 top
R1 "47K" 0402_R 574.37,1865.66 r270 top value=47kΩ
R2 "2K" 0402_R 698.34,1158.7 r180 top value=10kΩ
R3 "2K" 0402_R 826.39,1865.7 r0 top value=10kΩ
R4 "1.2K" 0603_R 470,2284.57 r90 bottom value=1.2kΩ
R5 "1K" 0402_R 295,2273.73 r270 top value=1kΩ
R6 "510R" 0603_R 1259.68,445 r0 top value=510Ω
R7 "49.9R" 0603_R 2041.74,528.98 r90 top value=49.9Ω
R8 "1K" 0402_R 395,2299.88 r270 top value=1kΩ
R9 "49.9R" 0603_R 2042.04,359.06 r90 top value=49.9Ω
R10 "5K1" 0402_R 195,2040 r0 bottom
R11 "100K" 0402_R 255,1320 r270 top value=10kΩ
R12 "10K" 0402_R 310,1320 r270 top value=10kΩ
R13 "5K1" 0402_R 195,2000 r0 bottom
R14 "49.9R" 0603_R 2203.75,440.25 r0 bottom value=49.9Ω
R15 "2K" 0402_R 395,1955 r0 top value=10kΩ
R16 "2K" 0402_R 285,1410 r0 top value=10kΩ
R17 "49.9R" 0603_R 2203.62,368.93 r0 bottom value=49.9Ω
R18 "0.25R" 1206_R 355,2059.69 r0 top value=10kΩ
R19 "10K" 0402_R 1968.81,421.25 r0 bottom value=10kΩ
R20 "10K" 0402_R 340,1875 r90 top value=10kΩ
R21 "12.1K" 0603_R 1828.29,240.51 r90 bottom value=12.1kΩ
R22 "510R" 0603_R 2201.92,295.57 r180 bottom value=510Ω
R23 "2K" 0402_R 435,1475 r0 bottom value=10kΩ
R24 "10K" 0402_R 512.6,1531.49 r90 bottom value=10kΩ
R25 "47K" 0402_R 360.08,1658.47 r0 top value=47kΩ
R26 "2K" 0402_R 535,1473.66 r180 top value=10kΩ
R27 "100K" 0402_R 710,135 r180 bottom value=10kΩ
R28 "100K" 0402_R 710,75 r180 bottom value=10kΩ
R29 "2K" 0402_R 411.73,1549 r270 bottom value=10kΩ
R30 "10K" 0402_R 945,2375 r180 top value=10kΩ
R31 "2K" 0402_R 106.6,1690 r0 top value=10kΩ
R32 "510R" 0603_R 2205.63,513.47 r180 bottom value=510Ω
R33 "100K" 0402_R 90.33,1573.21 r90 top value=10kΩ
R34 "10K" 0402_R 145.33,1573.21 r270 top value=10kΩ
R35 "1K" 0402_R 55.84,277.65 r270 top value=1kΩ
R36 "10K" 0402_R 839.76,506.61 r90 top value=10kΩ
R37 "1K" 0402_R 55.17,591.29 r90 top value=1kΩ
R38 "2K" 0402_R 2080,2065.51 r90 top value=10kΩ
R39 "10K" 0402_R 2045,2000 r0 top value=10kΩ
R40 "1K" 0402_R 1014.89,402.69 r90 top value=1kΩ
R41 "10K" 0402_R 957.3,402.69 r90 top value=10kΩ
R44 "2K" 0402_R 2080,1920 r90 top value=10kΩ
R45 "10K" 0402_R 320,1065 r270 top value=10kΩ
R46 "10K" 0402_R 2048.12,1847.78 r0 top value=10kΩ
R47 "2K" 0402_R 288.1,805.99 r270 top value=10kΩ
R48 "10K" 0402_R 407.9,805.99 r90 top value=10kΩ
R49 "100R" 0402_R 656.44,1072.38 r270 top value=100Ω
R50 "10K" 0402_R 1364.27,1727.45 r90 top value=10kΩ
R51 "10K" 0402_R 1423.89,572.36 r270 top value=10kΩ
R52 "22K" 0402_R 495,1095 r90 top value=47kΩ
R53 "47K" 0402_R 495,1000 r90 top value=47kΩ
R54 "10K" 0402_R 1205,572.36 r270 top value=10kΩ
R55 "10K" 0402_R 930,835 r270 top value=10kΩ
U1 "TP4056" ESOP-8_L4.9-W3.9-P1.27-LS6.0-BL-EP 630,2279.88 r270 top
U2 "LAN8720A-CP-TR" QFN-24_L4.0-W4.0-P0.50-BL-EP2.6 1914.52,310.91 r180 top
U3 "AMS1117-3.3V" SOT-89-3_L4.5-W2.5-P1.50-LS4.2-BR 711.61,1359.99 r180 top
U4 "AMS1117-3.3V" SOT-89-3_L4.5-W2.5-P1.50-LS4.2-BR 711.61,1565.89 r180 top
U5 "DX-WF24" DX-WF24-SMT 470,666.1 r180 top
U6 "W25Q128JVSIQ" SOIC-8_L5.3-W5.3-P1.27-LS8.0-BL 935.3,2128.78 r180 top
U7 "W9825G6KH-6" TSOP-54_L22.2-W10.2-P0.80-LS11.8-BL 1544.45,2072.13 r180 top
U8 "STM32F429IGT6" LQFP-176_L24.0-W24.0-P0.50-LS26.0-BL 1590,1148.86 r270 top
USB1 "TYPE-C 6P" TYPE-C-SMD_TYPE-C-6P 147.72,2019 r270 top
X1 "25M" SMD-3225_4P 1968.81,127.92 r0 top
X2 "25M" SMD-3225_4P 976.79,1044.22 r270 top
X3 "32.768K" SMD3225-2P 1003.62,1410 r270 top value=32.768kHz

## Footprints (in the part's own frame and the unit in brackets; to place one, negate y for a bottom-side part, rotate by r counter-clockwise, add the part's x,y. Pads: shape width x height; smd on the part's side, far side on the other; paste and mask are expansions set on the pad)
0402_C [mm]
  rect 0.6x0.65 smd mask+0.051: 1(-0.425,0) 2(0.425,0)
  silkscreen extent -0.97,-0.58 0.97,0.58, body extent -0.48,-0.3 0.52,0.3, height 0.2
0402_L [mm]
  rect 0.6x0.65 smd mask+0.051: 1(-0.425,0) 2(0.425,0)
  silkscreen extent -0.97,-0.58 0.97,0.58, body extent -0.51,-0.26 0.54,0.26, height 0.36
0402_R [mm]
  rect 0.6x0.65 smd mask+0.051: 1(-0.425,0) 2(0.425,0)
  silkscreen extent -0.97,-0.58 0.97,0.58, body extent -0.57,-0.27 0.58,0.28, height 0.41
0603_C [mm]
  rect 0.93x0.98 smd: 1(-0.77,0) 2(0.77,0)
  silkscreen extent -1.53,-0.79 1.54,0.79, body extent -0.8,-0.4 0.8,0.4, height 0.3
0603_R [mm]
  rect 0.93x0.98 smd: 1(-0.77,0) 2(0.77,0)
  silkscreen extent -1.53,-0.79 1.54,0.79, body extent -0.85,-0.4 0.85,0.4, height 0.56
0805_L [mm]
  rect 1.16x1.47 smd: 1(-0.89,0) 2(0.89,0)
  silkscreen extent -1.77,-1.04 1.77,1.03, body extent -1.02,-0.64 1.03,0.64, height 0.6
1206_C [mm]
  rect 1.13x1.8 smd: 1(-1.49,0) 2(1.49,0)
  silkscreen extent -2.36,-1.2 2.35,1.2, body extent -1.6,-0.81 1.6,0.79, height 1
1206_R [mm]
  rect 1.13x1.8 smd: 1(-1.49,0) 2(1.49,0)
  silkscreen extent -2.36,-1.2 2.35,1.2, body extent -1.7,-0.86 1.65,0.87, height 0.85
BAT-TH_BS-02-A1AJ010 [mm] "CR2032电池座"
  round 1.8 hole 1.2: 1(-10,0) 2(10,0)
  silkscreen extent -13.19,-11.09 11.36,11.09
CONN-SMD_2P-P1.00_XUNPU_WAFER-SH1.0-2PWB [mm]
  rect 0.5x1.7 smd paste+0 mask+0.05: 1(-0.5,1.7) 2(0.5,1.7)
  rect 1.2x2.5 smd paste+0 mask+0.05: 3(1.6,-1.7) 4(-1.6,-1.7)
  silkscreen extent -2.2,-2.6 2.2,2.54
CONN-TH_2P-P2.50_HX25003-2A [mm] "电池接线端子"
  rect 1.8x1.8 hole 1.1 paste+0 mask+0.05: 1(-1.25,0)
  round 1.8 hole 1.1 paste+0 mask+0.05: 2(1.25,0)
  silkscreen extent -3.75,-3.7 3.75,2.41
DX-WF24-SMT [mm]
  oval 1.7x1 smd: 1(-7.6,15) 2(-7.6,13.5) 3(-7.6,12) 4(-7.6,10.5) 5(-7.6,9) 6(-7.6,7.5) 7(-7.6,6) 8(-7.6,4.5) 9(-7.6,3) 10(-7.6,1.5) 19(7.6,1.5) 20(7.6,3) 21(7.6,4.5) 22(7.6,6) 23(7.6,7.5) 24(7.6,9) 25(7.6,10.5) 26(7.6,12) 27(7.6,13.5) 28(7.6,15)
  oval 1x1.7 smd: 11(-5.25,0) 12(-3.75,0) 13(-2.25,0) 14(-0.75,0) 15(0.75,0) 16(2.25,0) 17(3.75,0) 18(5.25,0)
  round 1 smd: 29(0,4.6)
  Top Layer region: -1.5,6 -0.2,6 1.5,4.3 1.5,3 -1.5,3 -1.5,6
  silkscreen extent -7.6,0 7.6,22
ESOP-8_L4.9-W3.9-P1.27-LS6.0-BL-EP [mm] "TP4056"
  rect 0.6x1.2 smd paste+0 mask+0.051: 1(-1.905,-2.908) 2(-0.635,-2.908) 3(0.635,-2.908) 4(1.905,-2.908) 5(1.905,2.908) 6(0.635,2.908) 7(-0.635,2.908) 8(-1.905,2.908)
  rect 3.3x2.4 smd paste+0 mask+0.051: 9(0,0)
  silkscreen extent -3.2,-2.67 2.55,2.05
FPC-SMD_AFC01-S05FCA-00 [mm]
  rect 0.3x1.3 smd: 1(-1,1.34) 2(-0.5,1.34) 3(0,1.34) 4(0.5,1.34) 5(1,1.34)
  rect 1.6x2 smd: 6(2.7,-1.34) 7(-2.7,-1.34)
  silkscreen extent -3.5,-4.57 3.5,2
FPC-SMD_AFC01-S14FCA-00 [mm]
  rect 0.3x1.3 smd: 1(-3.25,1.34) 2(-2.75,1.339) 3(-2.25,1.34) 4(-1.75,1.34) 5(-1.25,1.34) 6(-0.75,1.34) 7(-0.25,1.34) 8(0.25,1.34) 9(0.75,1.34) 10(1.25,1.34) 11(1.75,1.34) 12(2.25,1.34) 13(2.75,1.34) 14(3.25,1.34)
  rect 2x1.6 smd: 15(4.948,-1.34) 16(-4.948,-1.34)
  silkscreen extent -5.8,-4.3 5.7,1.9
FPC-SMD_AFC01-S40FCA-00 [mm]
  rect 0.3x1.3 smd: 1(-9.75,1.34) 2(-9.25,1.338) 3(-8.75,1.34) 4(-8.25,1.34) 5(-7.75,1.34) 6(-7.25,1.34) 7(-6.75,1.34) 8(-6.25,1.34) 9(-5.75,1.34) 10(-5.25,1.34) 11(-4.75,1.34) 12(-4.25,1.34) 13(-3.75,1.34) 14(-3.25,1.34) 15(-2.75,1.34) 16(-2.25,1.34) 17(-1.75,1.34) 18(-1.25,1.34) 19(-0.75,1.34) 20(-0.25,1.34) 21(0.25,1.34) 22(0.75,1.34) 23(1.25,1.34) 24(1.75,1.34) 25(2.25,1.34) 26(2.75,1.34) 27(3.25,1.34) 28(3.75,1.34) 29(4.25,1.34) 30(4.75,1.34) 31(5.25,1.34) 32(5.75,1.34) 33(6.25,1.34) 34(6.75,1.34) 35(7.25,1.34) 36(7.75,1.34) 37(8.25,1.34) 38(8.75,1.34) 39(9.25,1.34) 40(9.75,1.34)
  rect 2x1.6 smd: 41(-11.45,-1.34) 42(11.45,-1.34)
  silkscreen extent -12.21,-4.36 12.21,1.61
LED0402-RD [mm] "LED红"
  rect 0.636x0.54 smd paste-100 mask+0.051: 1(-0.538,0) 2(0.538,0)
  silkscreen extent -1.39,-0.54 1.09,0.54
LED0402-RD_ORANGE [mm] "LED橙色"
  rect 0.636x0.54 smd paste-100 mask+0.051: 1(-0.538,0) 2(0.538,0)
  silkscreen extent -1.39,-0.54 1.09,0.54
LED-SMD_L1.1-W0.6-FD [mm] "LED黄绿"
  rect 0.45x0.75 smd: 1(0.425,0) 2(-0.425,0)
  silkscreen extent -1.12,-0.5 1.15,0.5
LQFP-176_L24.0-W24.0-P0.50-LS26.0-BL [mm] "STM32F429IGT6"
  oval 0.28x1.8 smd: 1(-10.75,-12.55) 2(-10.25,-12.55) 3(-9.75,-12.55) 4(-9.25,-12.55) 5(-8.75,-12.55) 6(-8.25,-12.55) 7(-7.75,-12.55) 8(-7.25,-12.55) 9(-6.75,-12.55) 10(-6.25,-12.55) 11(-5.75,-12.55) 12(-5.25,-12.55) 13(-4.75,-12.55) 14(-4.25,-12.55) 15(-3.75,-12.55) 16(-3.25,-12.55) 17(-2.75,-12.55) 18(-2.25,-12.55) 19(-1.75,-12.55) 20(-1.25,-12.55) 21(-0.75,-12.55) 22(-0.25,-12.55) 23(0.25,-12.55) 24(0.75,-12.55) 25(1.25,-12.55) 26(1.75,-12.55) 27(2.25,-12.55) 28(2.75,-12.55) 29(3.25,-12.55) 30(3.75,-12.55) 31(4.25,-12.55) 32(4.75,-12.55) 33(5.25,-12.55) 34(5.75,-12.55) 35(6.25,-12.55) 36(6.75,-12.55) 37(7.25,-12.55) 38(7.75,-12.55) 39(8.25,-12.55) 40(8.75,-12.55) 41(9.25,-12.55) 42(9.75,-12.55) 43(10.25,-12.55) 44(10.75,-12.55) 89(10.75,12.55) 90(10.25,12.55) 91(9.75,12.55) 92(9.25,12.55) 93(8.75,12.55) 94(8.25,12.55) 95(7.75,12.55) 96(7.25,12.55) 97(6.75,12.55) 98(6.25,12.55) 99(5.75,12.55) 100(5.25,12.55) 101(4.75,12.55) 102(4.25,12.55) 103(3.75,12.55) 104(3.25,12.55) 105(2.75,12.55) 106(2.25,12.55) 107(1.75,12.55) 108(1.25,12.55) 109(0.75,12.55) 110(0.25,12.55) 111(-0.25,12.55) 112(-0.75,12.55) 113(-1.25,12.55) 114(-1.75,12.55) 115(-2.25,12.55) 116(-2.75,12.55) 117(-3.25,12.55) 118(-3.75,12.55) 119(-4.25,12.55) 120(-4.75,12.55) 121(-5.25,12.55) 122(-5.75,12.55) 123(-6.25,12.55) 124(-6.75,12.55) 125(-7.25,12.55) 126(-7.75,12.55) 127(-8.25,12.55) 128(-8.75,12.55) 129(-9.25,12.55) 130(-9.75,12.55) 131(-10.25,12.55) 132(-10.75,12.55)
  oval 1.8x0.28 smd: 45(12.55,-10.75) 46(12.55,-10.25) 47(12.55,-9.75) 48(12.55,-9.25) 49(12.55,-8.75) 50(12.55,-8.25) 51(12.55,-7.75) 52(12.55,-7.25) 53(12.55,-6.75) 54(12.55,-6.25) 55(12.55,-5.75) 56(12.55,-5.25) 57(12.55,-4.75) 58(12.55,-4.25) 59(12.55,-3.75) 60(12.55,-3.25) 61(12.55,-2.75) 62(12.55,-2.25) 63(12.55,-1.75) 64(12.55,-1.25) 65(12.55,-0.75) 66(12.55,-0.25) 67(12.55,0.25) 68(12.55,0.75) 69(12.55,1.25) 70(12.55,1.75) 71(12.55,2.25) 72(12.55,2.75) 73(12.55,3.25) 74(12.55,3.75) 75(12.55,4.25) 76(12.55,4.75) 77(12.55,5.25) 78(12.55,5.75) 79(12.55,6.25) 80(12.55,6.75) 81(12.55,7.25) 82(12.55,7.75) 83(12.55,8.25) 84(12.55,8.75) 85(12.55,9.25) 86(12.55,9.75) 87(12.55,10.25) 88(12.55,10.75) 133(-12.55,10.75) 134(-12.55,10.25) 135(-12.55,9.75) 136(-12.55,9.25) 137(-12.55,8.75) 138(-12.55,8.25) 139(-12.55,7.75) 140(-12.55,7.25) 141(-12.55,6.75) 142(-12.55,6.25) 143(-12.55,5.75) 144(-12.55,5.25) 145(-12.55,4.75) 146(-12.55,4.25) 147(-12.55,3.75) 148(-12.55,3.25) 149(-12.55,2.75) 150(-12.55,2.25) 151(-12.55,1.75) 152(-12.55,1.25) 153(-12.55,0.75) 154(-12.55,0.25) 155(-12.55,-0.25) 156(-12.55,-0.75) 157(-12.55,-1.25) 158(-12.55,-1.75) 159(-12.55,-2.25) 160(-12.55,-2.75) 161(-12.55,-3.25) 162(-12.55,-3.75) 163(-12.55,-4.25) 164(-12.55,-4.75) 165(-12.55,-5.25) 166(-12.55,-5.75) 167(-12.55,-6.25) 168(-12.55,-6.75) 169(-12.55,-7.25) 170(-12.55,-7.75) 171(-12.55,-8.25) 172(-12.55,-8.75) 173(-12.55,-9.25) 174(-12.55,-9.75) 175(-12.55,-10.25) 176(-12.55,-10.75)
  silkscreen extent -11.57,-13.03 11.25,11.25, body extent -13.04,-13.03 12.97,12.99, height 1.38
"PCBComponent_1 - duplicate" [mm]
  round 2.2 hole 1.8 paste+0 mask+0.051: 1(0,0)
  Top Layer region: -2.327,0 -2.327,0.229 -2.238,0.679 -2.062,1.102 -1.807,1.483 -1.483,1.807 -1.102,2.062 -0.679,2.238 -0.229,2.327 0.229,2.327 0.679,2.238 1.102,2.062 1.483,1.807 1.807,1.483 2.062,1.102 2.238,0.679 2.327,0.229 2.327,0 2.327,0 2.327,-0.229 2.238,-0.679 2.062,-1.102 1.807,-1.483 1.483,-1.807 1.102,-2.062 0.679,-2.238 0.229,-2.327 -0.229,-2.327 -0.679,-2.238 -1.102,-2.062 -1.483,-1.807 -1.807,-1.483 -2.062,-1.102 -2.238,-0.679 -2.327,-0.229 -2.327,0 -2.327,0 -2.327,0 -2.327,0
  Bottom Layer region: -2.327,0 -2.327,0.229 -2.238,0.679 -2.062,1.102 -1.807,1.483 -1.483,1.807 -1.102,2.062 -0.679,2.238 -0.229,2.327 0.229,2.327 0.679,2.238 1.102,2.062 1.483,1.807 1.807,1.483 2.062,1.102 2.238,0.679 2.327,0.229 2.327,0 2.327,-0.229 2.238,-0.679 2.062,-1.102 1.807,-1.483 1.483,-1.807 1.102,-2.062 0.679,-2.238 0.229,-2.327 -0.229,-2.327 -0.679,-2.238 -1.102,-2.062 -1.483,-1.807 -1.807,-1.483 -2.062,-1.102 -2.238,-0.679 -2.286,-0.254
  silkscreen extent -2.2,-2.2 2.2,2.2
QFN-24_L4.0-W4.0-P0.50-BL-EP2.6 [mm] "ETHER_PHY"
  rect 0.28x0.665 smd paste-100 mask+0.05: 1(-1.25,-1.908) 2(-0.75,-1.908) 3(-0.25,-1.908) 4(0.25,-1.908) 5(0.75,-1.908) 6(1.25,-1.908) 13(1.25,1.908) 14(0.75,1.908) 15(0.25,1.908) 16(-0.25,1.908) 17(-0.75,1.908) 18(-1.25,1.908)
  rect 0.665x0.28 smd paste-100 mask+0.05: 7(1.908,-1.25) 8(1.908,-0.75) 9(1.908,-0.25) 10(1.908,0.25) 11(1.908,0.75) 12(1.908,1.25) 19(-1.908,1.25) 20(-1.908,0.75) 21(-1.908,0.25) 22(-1.908,-0.25) 23(-1.908,-0.75) 24(-1.908,-1.25)
  rect 2.55x2.55 smd paste-100 mask+0.05: 25(0,0)
  silkscreen extent -2.08,-2.53 2.08,2.08
SMA_L4.3-W2.6-LS5.0-FD [mm] "SS34"
  rect 2.046x1.62 smd: 1(-2.304,-0.009) 2(2.304,0.009)
  silkscreen extent -2.17,-1.32 2.19,1.29
SMD3225-2P [mm]
  rect 1.05x1.7 smd: 1(-1.275,0) 2(1.275,0)
  silkscreen extent -2.03,-1.08 2.03,1.08
SMD-3225_4P [mm]
  rect 1.4x1.15 smd: 1(-1.1,-0.8) 2(1.1,-0.8) 3(1.1,0.8) 4(-1.1,0.8)
  silkscreen extent -2.1,-2.35 2.1,1.7, body extent -1.6,-1.25 1.6,1.25, height 0.61
SOD-123_L2.7-W1.6-LS3.7-RD [mm] "1N5819"
  rect 0.91x1.22 smd: 1(-1.635,0) 2(1.635,0)
  silkscreen extent -1.6,-1 1.38,1
SOIC-8_L5.3-W5.3-P1.27-LS8.0-BL [mm]
  oval 0.63x2.25 smd: 1(-1.905,-3.53) 2(-0.635,-3.53) 3(0.635,-3.53) 4(1.905,-3.53) 5(1.905,3.53) 6(0.635,3.53) 7(-0.635,3.53) 8(-1.905,3.53)
  silkscreen extent -2.82,-3.68 2.64,2.18
SOT-23-3_L2.9-W1.3-P1.90-LS2.4-BR [mm]
  rect 1.25x0.7 smd: 1(1,-0.95) 2(1,0.95) 3(-1,0)
  silkscreen extent -0.73,-1.53 0.73,1.53
SOT-23-3_L2.9-W1.4-P1.90-LS2.5-BR [mm] "HL6042 MMBT3904-E"
  rect 1.07x0.6 smd: 1(1.035,-0.95) 2(1.035,0.95) 3(-1.035,0)
  silkscreen extent -0.76,-1.52 0.76,1.52
SOT-23-3_L2.9-W1.6-P1.90-LS2.8-BR [mm]
  rect 1.07x0.6 smd: 1(1.235,-0.95) 2(1.235,0.95) 3(-1.235,0)
  silkscreen extent -0.88,-1.54 0.88,1.54
SOT-23-3_L3.0-W1.7-P0.95-LS2.9-BR [mil] "S8050"
  rect 40.85x20.95 smd: 1(43.36,-37.4) 2(43.36,37.4) 3(-43.36,0)
  silkscreen extent -34,-60 34,60
SOT-89-3_L4.5-W2.5-P1.50-LS4.2-BR [mm] "AMS1117"
  rect 1.575x0.672 smd: 1(1.356,-1.5) 3(1.356,1.5)
  round 0.38 smd: 2(-1.356,0)
  Top Layer region: -2.283,0.95 -0.429,0.95 -0.384,0.949 -0.34,0.946 -0.296,0.94 -0.252,0.933 -0.208,0.924 -0.165,0.912 -0.123,0.899 -0.081,0.884 -0.04,0.866 0,0.847 0.04,0.826 0.078,0.803 0.115,0.779 0.151,0.752 0.185,0.724 0.219,0.695 0.251,0.664 0.281,0.631 0.31,0.597 0.337,0.562 0.362,0.525 0.386,0.488 0.408,0.449 0.428,0.409 0.447,0.33 2.144,0.33 2.144,-0.33 0.447,-0.33 0.428,-0.409 0.408,-0.449 0.386,-0.488 0.362,-0.526 0.337,-0.562 0.31,-0.597 0.281,-0.631 0.251,-0.664 0.219,-0.695 0.185,-0.725 0.151,-0.753 0.115,-0.779 0.078,-0.804 0.04,-0.827 0,-0.848 -0.04,-0.867 -0.081,-0.884 -0.123,-0.899 -0.165,-0.913 -0.208,-0.924 -0.252,-0.934 -0.296,-0.941 -0.34,-0.946 -0.384,-0.949 -0.429,-0.95 -2.283,-0.95 -2.328,-0.949 -2.372,-0.946 -2.416,-0.941 -2.46,-0.934 -2.504,-0.924 -2.547,-0.913 -2.589,-0.899 -2.631,-0.884 -2.672,-0.867 -2.713,-0.848 -2.752,-0.827 -2.79,-0.804 -2.827,-0.779 -2.863,-0.753 -2.898,-0.725 -2.931,-0.695 -2.963,-0.664 -2.993,-0.631 -3.022,-0.597 -3.049,-0.562 -3.075,-0.526 -3.098,-0.488 -3.12,-0.449 -3.141,-0.409 -3.159,-0.369 -3.175,-0.327 -3.189,-0.285 -3.202,-0.242 -3.212,-0.199 -3.22,-0.155 -3.227,-0.111 -3.231,-0.067 -3.233,-0.022 -3.233,0.022 -3.231,0.067 -3.227,0.111 -3.22,0.155 -3.212,0.199 -3.202,0.242 -3.189,0.285 -3.175,0.327 -3.159,0.369 -3.141,0.409 -3.12,0.449 -3.098,0.488 -3.075,0.525 -3.049,0.562 -3.022,0.597 -2.993,0.631 -2.963,0.664 -2.931,0.695 -2.898,0.724 -2.863,0.752 -2.827,0.779 -2.79,0.803 -2.752,0.826 -2.713,0.847 -2.672,0.866 -2.631,0.884 -2.589,0.899 -2.547,0.912 -2.504,0.924 -2.46,0.933 -2.416,0.94 -2.372,0.946 -2.328,0.949 -2.283,0.95
  silkscreen extent -1.95,-2.33 0.7,2.33
TSOP-54_L22.2-W10.2-P0.80-LS11.8-BL [mm]
  oval 0.5x1.8 smd: 1(-10.4,-5.642) 2(-9.6,-5.642) 3(-8.8,-5.642) 4(-8,-5.642) 5(-7.2,-5.642) 6(-6.4,-5.642) 7(-5.6,-5.642) 8(-4.8,-5.642) 9(-4,-5.642) 10(-3.2,-5.642) 11(-2.4,-5.642) 12(-1.6,-5.642) 13(-0.8,-5.642) 14(0,-5.642) 15(0.8,-5.642) 16(1.6,-5.642) 17(2.4,-5.642) 18(3.2,-5.642) 19(4,-5.642) 20(4.8,-5.642) 21(5.6,-5.642) 22(6.4,-5.642) 23(7.2,-5.642) 24(8,-5.642) 25(8.8,-5.642) 26(9.6,-5.642) 27(10.4,-5.642) 28(10.4,5.642) 29(9.6,5.642) 30(8.8,5.642) 31(8,5.642) 32(7.2,5.642) 33(6.4,5.642) 34(5.6,5.642) 35(4.8,5.642) 36(4,5.642) 37(3.2,5.642) 38(2.4,5.642) 39(1.6,5.642) 40(0.8,5.642) 41(0,5.642) 42(-0.8,5.642) 43(-1.6,5.642) 44(-2.4,5.642) 45(-3.2,5.642) 46(-4,5.642) 47(-4.8,5.642) 48(-5.6,5.642) 49(-6.4,5.642) 50(-7.2,5.642) 51(-8,5.642) 52(-8.8,5.642) 53(-9.6,5.642) 54(-10.4,5.642)
  silkscreen extent -11.23,-5.79 11.19,4.65
TYPE-C-SMD_TYPE-C-6P [mm]
  oval 1.1x1.9 hole 0.7 slot 1.5 at 90 deg: 7(-4.32,1.775) 7(-4.32,-2.025) 7(4.32,1.775) 7(4.32,-2.025)
  rect 0.7x1.2 smd paste-100 mask+0.051: A5(-0.5,2.025) A9(1.5,2.025) B5(0.5,2.025) B9(-1.5,2.025)
  rect 0.8x1.2 smd paste-100 mask+0.051: A12(2.7,2.025) B12(-2.7,2.025)
  silkscreen extent -4.5,-4.63 4.5,2.18

## Part data
B1: "CR2032电池座", JLCPCB Part Class="Extended Part", LCSC Part Name="电池底座 适用电池:CR2032", Manufacturer=MYOUNG(美阳), Operating Temperature=-25℃~+85℃, Add into BOM=yes, Battery Type=CR2032, Connector Type=电池底座, Contact Material=磷青铜, Contact Plating=镍, Convert to PCB=yes, Datasheet=https://item.szlcsc.com/datasheet/BS-02-A1AJ010/5943286.html, Device=BS-02-A1AJ010, Manufacturer Part=BS-02-A1AJ010, Supplier=LCSC, Supplier Footprint=插件, Supplier Part=C5239862, Symbol=BS-02-A1AJ010
C1 C2 C5 C9 C11 C14 C15 C16 C17 C20: library part 0402C_104, "电容100nf", JLCPCB Part Class="Basic Part", LCSC Part Name="20pF ±5% 50V", Manufacturer=FH(风华), Manufacturer Part=0402CG200J500NT, Temperature Coefficient=C0G, Tolerance=±5%, Voltage Rated=50V, Add into BOM=yes, Convert to PCB=yes, Datasheet=https://atta.szlcsc.com/upload/public/pdf/source/20170923/C1554_1506149268708988361.pdf, Device=0402CG200J500NT, Name=20pF, Supplier=LCSC, Supplier Footprint=0402, Supplier Part=C1554, Symbol=0402CG200J500NT
C4 C6 C7 C8 C10: library part CGA0603X5R106K100JT, "电容10uf", JLCPCB Part Class="Extended Part", LCSC Part Name="10uF ±10% 10V", Manufacturer=HRE(芯声), Temperature Coefficient=X5R, Tolerance=±10%, Voltage Rating=10V, Add into BOM=yes, Convert to PCB=yes, Device=CGA0603X5R106K100JT, Manufacturer Part=CGA0603X5R106K100JT, Supplier=LCSC, Supplier Footprint=0603, Supplier Part=C6119842, Symbol=CGA0603X5R106K100JT
C12 C22 C23 C24: library part 0402C_105, "电容1uf", JLCPCB Part Class="Basic Part", LCSC Part Name="20pF ±5% 50V", Manufacturer=FH(风华), Manufacturer Part=0402CG200J500NT, Temperature Coefficient=C0G, Tolerance=±5%, Voltage Rated=50V, Add into BOM=yes, Convert to PCB=yes, Datasheet=https://atta.szlcsc.com/upload/public/pdf/source/20170923/C1554_1506149268708988361.pdf, Device=0402CG200J500NT, Name=20pF, Supplier=LCSC, Supplier Footprint=0402, Supplier Part=C1554, Symbol=0402CG200J500NT
C13: library part 0402B471K500NT, "电容470pf", JLCPCB Part Class="Extended Part", LCSC Part Name="470pF ±10% 50V", Manufacturer=FH(风华), Temperature Coefficient=X7R, Tolerance=±10%, Voltage Rating=50V, Add into BOM=yes, Convert to PCB=yes, Datasheet=https://item.szlcsc.com/datasheet/0402B471K500NT/1889.html, Device=0402B471K500NT, Manufacturer Part=0402B471K500NT, Supplier=LCSC, Supplier Footprint=0402, Supplier Part=C1537, Symbol=0402B471K500NT
C18 C19 C25 C26: library part 0402C_200, "电容20pf", JLCPCB Part Class="Basic Part", LCSC Part Name="20pF ±5% 50V", Manufacturer=FH(风华), Manufacturer Part=0402CG200J500NT, Temperature Coefficient=C0G, Tolerance=±5%, Voltage Rated=50V, Add into BOM=yes, Convert to PCB=yes, Datasheet=https://atta.szlcsc.com/upload/public/pdf/source/20170923/C1554_1506149268708988361.pdf, Device=0402CG200J500NT, Name=20pF, Supplier=LCSC, Supplier Footprint=0402, Supplier Part=C1554, Symbol=0402CG200J500NT
C21: library part CL31A107MQHNNNE, "电容100uf", JLCPCB Part Class="Basic Part", LCSC Part Name="100uF ±20% 6.3V", Manufacturer=SAMSUNG(三星), Temperature Coefficient=X5R, Tolerance=±20%, Voltage Rating=6.3V, Add into BOM=yes, Convert to PCB=yes, Datasheet=https://item.szlcsc.com/datasheet/CL31A107MQHNNNE/15681.html, Device=CL31A107MQHNNNE, Manufacturer Part=CL31A107MQHNNNE, Supplier=LCSC, Supplier Footprint=1206, Supplier Part=C15008, Symbol=CL31A107MQHNNNE
C27 C28: library part 0402C_120, "电容12pf", JLCPCB Part Class="Basic Part", LCSC Part Name="20pF ±5% 50V", Manufacturer=FH(风华), Manufacturer Part=0402CG200J500NT, Temperature Coefficient=C0G, Tolerance=±5%, Voltage Rated=50V, Add into BOM=yes, Convert to PCB=yes, Datasheet=https://atta.szlcsc.com/upload/public/pdf/source/20170923/C1554_1506149268708988361.pdf, Device=0402CG200J500NT, Name=20pF, Supplier=LCSC, Supplier Footprint=0402, Supplier Part=C1554, Symbol=0402CG200J500NT
C29 C30 C31 C32 C33 C34 C35 C36 C37 C38 C39 C40 C41 C42 C43 C44 C46 C47 C48 C49 C50 C51 C52 C53: library part 0402C, "电容", JLCPCB Part Class="Basic Part", LCSC Part Name="20pF ±5% 50V", Manufacturer=FH(风华), Manufacturer Part=0402CG200J500NT, Temperature Coefficient=C0G, Tolerance=±5%, Voltage Rated=50V, Add into BOM=yes, Convert to PCB=yes, Datasheet=https://atta.szlcsc.com/upload/public/pdf/source/20170923/C1554_1506149268708988361.pdf, Device=0402CG200J500NT, Name=20pF, Supplier=LCSC, Supplier Footprint=0402, Supplier Part=C1554, Symbol=0402CG200J500NT
C45 C54: library part 0402C_225, "电容2.2uf", JLCPCB Part Class="Basic Part", LCSC Part Name="20pF ±5% 50V", Manufacturer=FH(风华), Manufacturer Part=0402CG200J500NT, Temperature Coefficient=C0G, Tolerance=±5%, Voltage Rated=50V, Add into BOM=yes, Convert to PCB=yes, Datasheet=https://atta.szlcsc.com/upload/public/pdf/source/20170923/C1554_1506149268708988361.pdf, Device=0402CG200J500NT, Name=20pF, Supplier=LCSC, Supplier Footprint=0402, Supplier Part=C1554, Symbol=0402CG200J500NT
D1 D2 D3: library part XL-1005SYGC_C22470306, "LED黄绿", Forward Current=20mA, Forward Voltage (VF)=2.3V, JLCPCB Part Class="Extended Part", Lens Color=无色透明透镜, Manufacturer=XINGLIGHT(成兴光), Operating Temperature=-20℃~+85℃, Power Dissipation=50mW, Add into BOM=yes, Convert to PCB=yes, Datasheet=https://atta.szlcsc.com/upload/public/pdf/source/20240218/8EA55035A64B003AF213B47ACC00F41E.pdf, Device=XL-1005SYGC_C22470306, Dominant Wavelength=565nm~575nm, LCSC Part Name=XL-1005SYGC, Luminous Intensity=240mcd, Manufacturer Part=XL-1005SYGC, Mounting Sytle=正贴, Peak Wavelength=572nm, Supplier=LCSC, Supplier Footprint=0402, Supplier Part=C22470306, Symbol=XL-1005SYGC_C22470306, Viewing Angle=120°
D4: Current - Rectified=3A, JLCPCB Part Class="Extended Part", LCSC Part Name="电压:40V 电流:3A", Manufacturer=R+O(宏嘉诚), Reverse Leakage Current (Ir)=200uA@40V, Voltage - DC Reverse(Vr)=40V, Voltage - Forward(Vf@If)=550mV@3.0A, Add into BOM=yes, Convert to PCB=yes, Datasheet=https://item.szlcsc.com/datasheet/SS34/8397187.html, Device=SS34_C7420365, Diode Configuration=独立式, Manufacturer Part=SS34, Supplier=LCSC, Supplier Footprint=SMA(DO-214AC), Supplier Part=C7420365, Symbol=SS34_C7420365
D5 D8 D9: library part XL-1005SURC_C25503345, "LED红", Forward Current=20mA, Illumination Color=红色, JLCPCB Part Class="Extended Part", LCSC Part Name=0402分光红贴片式发光二极管, Manufacturer=XINGLIGHT(成兴光), Operating Temperature=-40℃~+85℃, Power(Watts)=50mW, Voltage - Forward(Vf)=1.8V~2.4V, Add into BOM=yes, Convert to PCB=yes, Datasheet=https://item.szlcsc.com/datasheet/XL-1005SURC/27234956.html, Device=XL-1005SURC_C25503345, Luminous Intensity=200mcd, Manufacturer Part=XL-1005SURC, Peak Wavelength=625nm, Supplier=LCSC, Supplier Footprint=0402, Supplier Part=C25503345, Symbol=XL-1005SURC_C25503345, Viewing Angle=120°, Wavelength - Dominant=615nm~630nm
D6 D7: "肖特基二极管", Current - Rectified=1A, JLCPCB Part Class="Extended Part", LCSC Part Name="电压:40V 电流:1A", Manufacturer=DIODES(美台), Non-Repetitive Peak Forward Surge Current=25A, Operating Junction Temperature Range=-65℃~+150℃, Reverse Leakage Current (Ir)=1mA@40V, Voltage - DC Reverse(Vr)=40V, Voltage - Forward(Vf@If)=450mV@1A, Add into BOM=yes, Convert to PCB=yes, Datasheet=https://item.szlcsc.com/datasheet/1N5819HW-7-F/83701.html, Device=1N5819HW-7-F, Diode Configuration=1个独立式, Manufacturer Part=1N5819HW-7-F, Supplier=LCSC, Supplier Footprint=SOD-123, Supplier Part=C82544, Symbol=1N5819HW-7-F
D10: "LED橙", Color Temperature=-, Forward Current=20mA, Illumination Color=橙色, JLCPCB Part Class="Extended Part", LCSC Part Name=0402橙贴片式发光二极管, Lens Color=无色透明透镜, Manufacturer=XINGLIGHT(成兴光), Operating Temperature=-40℃~+85℃, Power(Watts)=50mW, Voltage - Forward(Vf)=2.3V, Add into BOM=yes, Convert to PCB=yes, Datasheet=https://item.szlcsc.com/datasheet/XL-1005UOC/1051400.html, Device=XL-1005UOC, Luminous Intensity=350mcd, Manufacturer Part=XL-1005UOC, Mounting Style=正贴, Peak Wavelength=605nm, Supplier=LCSC, Supplier Footprint=0402, Supplier Part=C965791, Symbol=XL-1005UOC, Viewing Angle=120°, Wavelength - Dominant=600nm~610nm
D11: "共阴二极管", Current - Rectified=200mA, JLCPCB Part Class="Extended Part", LCSC Part Name="电压:30V 电流:200mA", Manufacturer=Nexperia(安世), Non-Repetitive Peak Forward Surge Current=600mA, Reverse Leakage Current (Ir)=2uA@25V, Voltage - DC Reverse(Vr)=30V, Voltage - Forward(Vf@If)=800mV@100mA, Add into BOM=yes, Convert to PCB=yes, Datasheet=https://item.szlcsc.com/datasheet/BAT54C%252C215/38684.html, Device=BAT54C,215, Diode Configuration=1对共阴极, Manufacturer Part=BAT54C,215, Supplier=LCSC, Supplier Footprint=SOT-23, Supplier Part=C37704, Symbol=BAT54C,215
J1: Color=白色, Current Rating=3A, Flame Retardant Rating=UL94V-0, JLCPCB Part Class="Extended Part", LCSC Part Name="1x2P 间距:2.5mm 直插 系列:XH", Manufacturer=Megastar(兆星), Operating Temperature=-25℃~+85℃, Voltage Rating=250V, Add into BOM=yes, Contact Material=黄铜, Contact Plating=锡, Convert to PCB=yes, Datasheet=https://item.szlcsc.com/datasheet/ZX-XH2.54-2PZZ/8427549.html, Device=ZX-XH2.54-2PZZ, Manufacturer Part=ZX-XH2.54-2PZZ, Mounting Type=直插, Number of Pins=2P, Number of PINs Per Row=2, Number of Rows=1, Pins Structure=1x2P, Pitch=2.5mm, Plastic Material=PA66, Reference Series=XH, Row Spacing=-, Supplementary Features=-, Supplier=LCSC, Supplier Footprint=插件,P=2.5mm, Supplier Part=C7429632, Symbol=ZX-XH2.54-2PZZ, X-Length of Bottom Edge on Board (Spacing Line)=7.5mm, Y-Width of Bottom Edge on Board=5.9mm, Z-Height of the Board=7mm
J2: "FPC", JLCPCB Part Class="Extended Part", LCSC Part Name="间距:0.5mm P数:14P 翻盖式 下接", Manufacturer=JS(钜硕电子), Operating Temperature Range=-, Add into BOM=yes, Contact Type=下接, Convert to PCB=yes, Datasheet=https://atta.szlcsc.com/upload/public/pdf/source/20190816/C413942_2A72D1AC756EAE17EEDF756A339D4500.pdf, Device=AFC01-S14FCA-00, FFC, FCB Thickness=0.3mm, Height Above Board=2mm, Locking Feature=翻盖式, Manufacturer Part=AFC01-S14FCA-00, Mounting Type=卧贴, Number of Contacts=14P, Pitch=0.5mm, Supplier=LCSC, Supplier Footprint=SMD,P=0.5mm,卧贴, Supplier Part=C262663, Symbol=AFC01-S14FCA-00
J3 J4 J7 J8: "按键连接器", Color=米色, Current Rating=1A, Flame Retardant Rating=-, JLCPCB Part Class="Extended Part", LCSC Part Name="1x2P 间距:1mm 卧贴 系列:SH", Manufacturer=XUNPU(讯普), Operating Temperature=-40℃~+85℃, Voltage Rating=50V, Add into BOM=yes, Contact Material=黄铜, Contact Plating=锡, Convert to PCB=yes, Datasheet=https://item.szlcsc.com/datasheet/WAFER-SH1.0-2PWB/3561353.html, Device=WAFER-SH1.0-2PWB, Manufacturer Part=WAFER-SH1.0-2PWB, Mounting Type=卧贴, Number of Pins=2P, Number of PINs Per Row=2, Number of Rows=1, Pins Structure=1x2P, Pitch=1mm, Plastic Material=LCP, Reference Series=SH, Row Spacing=-, Supplementary Features=辅助焊脚, Supplier=LCSC, Supplier Footprint=SMD,P=1mm,卧贴, Supplier Part=C3029341, Symbol=WAFER-SH1.0-2PWB, X-Length of Bottom Edge on Board (Spacing Line)=4.35mm, Y-Width of Bottom Edge on Board=4.3mm, Z-Height of the Board=3.15mm
J5: "FPC", JLCPCB Part Class="Extended Part", LCSC Part Name="间距:0.5mm P数:40P 翻盖式 下接", Manufacturer=JS(钜硕电子), Add into BOM=yes, Contact Type=下接, Convert to PCB=yes, Datasheet=https://item.szlcsc.com/datasheet/AFC01-S40FCA-00/253933.html, Device=AFC01-S40FCA-00, FFC, FCB Thickness=0.3mm, Height Above Board=2mm, Locking Feature=翻盖式, Manufacturer Part=AFC01-S40FCA-00, Mounting Type=卧贴, Number of Contacts=40P, Pitch=0.5mm, Supplier=LCSC, Supplier Footprint=SMD,P=0.5mm,卧贴, Supplier Part=C262674, Symbol=AFC01-S40FCA-00
J6: "DEBUG", JLCPCB Part Class="Extended Part", LCSC Part Name="间距:0.5mm P数:5P 翻盖式 下接", Manufacturer=JS(钜硕电子), Add into BOM=yes, Contact Type=下接, Convert to PCB=yes, Datasheet=https://item.szlcsc.com/datasheet/AFC01-S05FCA-00/253913.html, Device=AFC01-S05FCA-00, FFC, FCB Thickness=0.3mm, Height Above Board=2mm, Locking Feature=翻盖式, Manufacturer Part=AFC01-S05FCA-00, Mounting Type=卧贴, Number of Contacts=5P, Pitch=0.5mm, Supplier=LCSC, Supplier Footprint=SMD,P=0.5mm,卧贴, Supplier Part=C262654, Symbol=AFC01-S05FCA-00
L1: "磁珠", Current Rating=2A, DC Resistance=45mΩ, Impedance @ Frequency=220Ω@100MHz, JLCPCB Part Class="Extended Part", LCSC Part Name="单路 0805磁珠 阻抗220Ω@100MHz", Manufacturer=muRata(村田), Tolerance=±25%, Add into BOM=yes, Circuits=1, Convert to PCB=yes, Datasheet=https://atta.szlcsc.com/upload/public/pdf/source/20180326/C118443_3FAC30E9A4F0E6B81275543C61E0685E.pdf, Device=BLM21PG221SN1D, Manufacturer Part=BLM21PG221SN1D, Supplier=LCSC, Supplier Footprint=0805, Supplier Part=C85840, Symbol=BLM21PG221SN1D
L2: Current Rating=1A, DC Resistance(DCR)=25mΩ, Impedance @ Frequency=10Ω@100MHz, JLCPCB Part Class="Extended Part", LCSC Part Name="单路 0402磁珠 阻抗10Ω@100MHz", Manufacturer=muRata(村田), Operating Temperature=-55℃~+125℃, Tolerance=-, Add into BOM=yes, Convert to PCB=yes, Datasheet=https://item.szlcsc.com/datasheet/BLM15AG100SN1D/78009.html, Device=BLM15AG100SN1D, Manufacturer Part=BLM15AG100SN1D, Number of Circuits=1, Supplier=LCSC, Supplier Footprint=0402, Supplier Part=C76882, Symbol=BLM15AG100SN1D
Q1 Q2 Q5 Q6: Current - Continuous Drain(Id)=5A, Drain to Source Voltage=20V, Gate Threshold Voltage (Vgs(th))=900mV@250uA, Input Capacitance(Ciss)=905pF, JLCPCB Part Class="Extended Part", LCSC Part Name="1个P沟道 耐压:20V 电流:5A", Manufacturer=R+O(宏嘉诚), Operating Temperature=-55℃~+150℃, Output Capacitance(Coss)=150pF, Pd - Power Dissipation=1.5W, Reverse Transfer Capacitance (Crss@Vds)=115pF, Add into BOM=yes, Convert to PCB=yes, Datasheet=https://item.szlcsc.com/datasheet/HL6042/30381010.html, Device=HL6042, Gate Charge(Qg)=11nC@4.5V, Manufacturer Part=HL6042, Number=1个P沟道, RDS(on)=43mΩ@4.5V, Supplier=LCSC, Supplier Footprint=SOT-23, Supplier Part=C28646264, Symbol=HL6042, Type=P沟道
Q3 Q4 Q8: "NPN", Collector - Emitter Voltage VCEO=40V, Current - Collector Cutoff=100nA, Current - Collector(Ic)=200mA, DC Current Gain=300@10mA,1V, Emitter-Base Voltage(Vebo)=6V, JLCPCB Part Class="Extended Part", LCSC Part Name="NPN 电流:200mA 电压:40V", Manufacturer=MDD(辰达半导体), Pd - Power Dissipation=200mW, Transition frequency(fT)=300MHz, Add into BOM=yes, Convert to PCB=yes, Datasheet=https://item.szlcsc.com/datasheet/MMBT3904-E/43133593.html, Device=MMBT3904-E, Manufacturer Part=MMBT3904-E, Number=1个NPN, Supplier=LCSC, Supplier Footprint=SOT-23, Supplier Part=C41371422, Symbol=MMBT3904-E, Type=NPN, Vce Saturation(VCE(sat))=500mV@50mA,5mA
Q7: library part MMBT3906_C364311, "PNP", Collector - Emitter Voltage VCEO=40V, Current - Collector Cutoff=100nA, Current - Collector(Ic)=200mA, DC Current Gain=300@10mA,1V, Emitter-Base Voltage(Vebo)=5V, JLCPCB Part Class="Extended Part", LCSC Part Name="PNP 电流:200mA 电压:40V", Manufacturer=MDD(辰达半导体), Operating Temperature=-55℃~+150℃, Pd - Power Dissipation=200mW, Transition frequency(fT)=300MHz, Add into BOM=yes, Convert to PCB=yes, Datasheet=https://item.szlcsc.com/datasheet/MMBT3906/338623.html, Device=MMBT3906_C364311, Manufacturer Part=MMBT3906, Number=1个PNP, Supplier=LCSC, Supplier Footprint=SOT-23, Supplier Part=C364311, Symbol=MMBT3906-2A, Type=PNP, Vce Saturation(VCE(sat))=300mV@50mA,5mA
Q9: library part S8050_C364312, "NPN", Collector - Emitter Voltage VCEO=25V, Current - Collector Cutoff=100nA, Current - Collector(Ic)=500mA, DC Current Gain=-, Emitter-Base Voltage(Vebo)=5V, JLCPCB Part Class="Extended Part", LCSC Part Name="hFE:200-350 NPN 电流:500mA 电压:25V", Manufacturer=MDD(辰达半导体), Operating Temperature=-55℃~+150℃, Pd - Power Dissipation=300mW, Transition frequency(fT)=150MHz, Add into BOM=yes, Configuration=-, Convert to PCB=yes, Datasheet=https://item.szlcsc.com/datasheet/S8050/338624.html, Device=S8050_C364312, Manufacturer Part=S8050, Number=-, Supplier=LCSC, Supplier Footprint=SOT-23, Supplier Part=C364312, Symbol=S8050-J3Y, Type=NPN, Vce Saturation(VCE(sat))=600mV@500mA,50mA
R1 R25 R52: library part 0402WGF4702TCE, "电阻47K", JLCPCB Part Class="Basic Part", LCSC Part Name="47kΩ ±1% 62.5mW 厚膜电阻", Manufacturer=UNI-ROYAL(厚声), Operating Temperature=-55℃~+155℃, Power(Watts)=62.5mW, Temperature Coefficient=±100ppm/℃, Tolerance=±1%, Voltage-Supply(Max)=50V, Add into BOM=yes, Convert to PCB=yes, Datasheet=https://item.szlcsc.com/datasheet/0402WGF4702TCE/26535.html, Device=0402WGF4702TCE, Manufacturer Part=0402WGF4702TCE, Supplier=LCSC, Supplier Footprint=0402, Supplier Part=C25792, Symbol=0402WGF4702TCE, Type=厚膜电阻
R2 R3 R15 R16 R23 R26 R29 R31 R38 R44 R47: library part 0402WGF2001TCE, "电阻2K", JLCPCB Part Class="Basic Part", LCSC Part Name="10kΩ ±1% 62.5mW", Manufacturer=UNI-ROYAL(厚声), Manufacturer Part=0402WGF1002TCE, Operating Temperature Range=-55℃~+155℃, Overload Voltage (Max)=50V, Power(Watts)=62.5mW, Temperature Coefficient=±100ppm/℃, Tolerance=±1%, Add into BOM=yes, Convert to PCB=yes, Datasheet=https://atta.szlcsc.com/upload/public/pdf/source/20200306/C422600_1E6D84923E4A46A82E41ADD87F860B5C.pdf, Device=0402WGF1002TCE, Name=10kΩ, Supplier=LCSC, Supplier Footprint=0402, Supplier Part=C25744, Symbol=0402WGF1002TCE, Type=厚膜电阻
R4: library part 0603WAF1201T5E, "电阻1.2K", JLCPCB Part Class="Basic Part", LCSC Part Name="1.2kΩ ±1% 100mW 厚膜电阻", Manufacturer=UNI-ROYAL(厚声), Operating Temperature=-55℃~+155℃, Power(Watts)=100mW, Temperature Coefficient=±100ppm/℃, Tolerance=±1%, Voltage-Supply(Max)=75V, Add into BOM=yes, Convert to PCB=yes, Datasheet=https://item.szlcsc.com/datasheet/0603WAF1201T5E/23492.html, Device=0603WAF1201T5E, Manufacturer Part=0603WAF1201T5E, Supplier=LCSC, Supplier Footprint=0603, Supplier Part=C22765, Symbol=0603WAF1201T5E, Type=厚膜电阻
R5 R8 R35 R37 R40: library part 0402WGF1001TCE, "电阻1K", JLCPCB Part Class="Basic Part", LCSC Part Name="1kΩ ±1% 62.5mW 厚膜电阻", Manufacturer=UNI-ROYAL(厚声), Operating Temperature=-55℃~+155℃, Power(Watts)=62.5mW, Temperature Coefficient=±100ppm/℃, Tolerance=±1%, Voltage-Supply(Max)=50V, Add into BOM=yes, Convert to PCB=yes, Datasheet=https://item.szlcsc.com/datasheet/0402WGF1001TCE/12256.html, Device=0402WGF1001TCE, Manufacturer Part=0402WGF1001TCE, Supplier=LCSC, Supplier Footprint=0402, Supplier Part=C11702, Symbol=0402WGF1001TCE, Type=厚膜电阻
R6 R22 R32: library part 0603WAF5100T5E, "电阻510R", JLCPCB Part Class="Basic Part", LCSC Part Name="510Ω ±1% 100mW 厚膜电阻", Manufacturer=UNI-ROYAL(厚声), Operating Temperature=-55℃~+155℃, Power(Watts)=100mW, Temperature Coefficient=±100ppm/℃, Tolerance=±1%, Voltage-Supply(Max)=75V, Add into BOM=yes, Convert to PCB=yes, Datasheet=https://item.szlcsc.com/datasheet/0603WAF5100T5E/23920.html, Device=0603WAF5100T5E, Manufacturer Part=0603WAF5100T5E, Supplier=LCSC, Supplier Footprint=0603, Supplier Part=C23193, Symbol=0603WAF5100T5E, Type=厚膜电阻
R7 R9 R14 R17: library part 0603WAF499JT5E, "电阻49.9R", JLCPCB Part Class="Basic Part", LCSC Part Name="49.9Ω ±1% 100mW 厚膜电阻", Manufacturer=UNI-ROYAL(厚声), Operating Temperature=-55℃~+155℃, Power(Watts)=100mW, Temperature Coefficient=±100ppm/℃, Tolerance=±1%, Voltage-Supply(Max)=75V, Add into BOM=yes, Convert to PCB=yes, Datasheet=https://item.szlcsc.com/datasheet/0603WAF499JT5E/23912.html, Device=0603WAF499JT5E, Manufacturer Part=0603WAF499JT5E, Supplier=LCSC, Supplier Footprint=0603, Supplier Part=C23185, Symbol=0603WAF499JT5E, Type=厚膜电阻
R10 R13: library part 0402WGF5101TCE, "电阻5.1K"
R11 R27 R28 R33: library part 0402WGF1003TCE, "电阻100K", JLCPCB Part Class="Basic Part", LCSC Part Name="10kΩ ±1% 62.5mW", Manufacturer=UNI-ROYAL(厚声), Manufacturer Part=0402WGF1002TCE, Operating Temperature Range=-55℃~+155℃, Overload Voltage (Max)=50V, Power(Watts)=62.5mW, Temperature Coefficient=±100ppm/℃, Tolerance=±1%, Add into BOM=yes, Convert to PCB=yes, Datasheet=https://atta.szlcsc.com/upload/public/pdf/source/20200306/C422600_1E6D84923E4A46A82E41ADD87F860B5C.pdf, Device=0402WGF1002TCE, Name=10kΩ, Supplier=LCSC, Supplier Footprint=0402, Supplier Part=C25744, Symbol=0402WGF1002TCE, Type=厚膜电阻
R12 R19 R20 R24 R30 R34 R36 R39 R41 R45 R46 R48 R50 R51 R54 R55: library part 0402WGF1002TCE, "电阻10K", JLCPCB Part Class="Basic Part", LCSC Part Name="10kΩ ±1% 62.5mW", Manufacturer=UNI-ROYAL(厚声), Operating Temperature Range=-55℃~+155℃, Overload Voltage (Max)=50V, Power(Watts)=62.5mW, Temperature Coefficient=±100ppm/℃, Tolerance=±1%, Add into BOM=yes, Convert to PCB=yes, Datasheet=https://atta.szlcsc.com/upload/public/pdf/source/20200306/C422600_1E6D84923E4A46A82E41ADD87F860B5C.pdf, Device=0402WGF1002TCE, Manufacturer Part=0402WGF1002TCE, Name=10kΩ, Supplier=LCSC, Supplier Footprint=0402, Supplier Part=C25744, Symbol=0402WGF1002TCE, Type=厚膜电阻
R18: library part 0402WGF1002TCE, "res", JLCPCB Part Class="Basic Part", LCSC Part Name="10kΩ ±1% 62.5mW", Manufacturer=UNI-ROYAL(厚声), Operating Temperature Range=-55℃~+155℃, Overload Voltage (Max)=50V, Power(Watts)=62.5mW, Temperature Coefficient=±100ppm/℃, Tolerance=±1%, Add into BOM=yes, Convert to PCB=yes, Datasheet=https://atta.szlcsc.com/upload/public/pdf/source/20200306/C422600_1E6D84923E4A46A82E41ADD87F860B5C.pdf, Device=0402WGF1002TCE, Manufacturer Part=0402WGF1002TCE, Name=10kΩ, Supplier=LCSC, Supplier Footprint=0402, Supplier Part=C25744, Symbol=0402WGF1002TCE, Type=厚膜电阻
R21: library part 0603WAF1212T5E, "电阻12.1K", JLCPCB Part Class="Extended Part", LCSC Part Name="12.1kΩ ±1% 100mW 厚膜电阻", Manufacturer=UNI-ROYAL(厚声), Operating Temperature=-55℃~+155℃, Power(Watts)=100mW, Temperature Coefficient=±100ppm/℃, Tolerance=±1%, Voltage-Supply(Max)=75V, Add into BOM=yes, Convert to PCB=yes, Datasheet=https://item.szlcsc.com/datasheet/0603WAF1212T5E/23591.html, Device=0603WAF1212T5E, Manufacturer Part=0603WAF1212T5E, Supplier=LCSC, Supplier Footprint=0603, Supplier Part=C22864, Symbol=0603WAF1212T5E, Type=厚膜电阻
R49: library part 0402WGF1000TCE, "电阻100R", JLCPCB Part Class="Basic Part", LCSC Part Name="100Ω ±1% 62.5mW 厚膜电阻", Manufacturer=UNI-ROYAL(厚声), Operating Temperature Range=-55℃~+155℃, Overload Voltage (Max)=50V, Power(Watts)=62.5mW, Temperature Coefficient=±200ppm/℃, Tolerance=±1%, Add into BOM=yes, Convert to PCB=yes, Datasheet=https://atta.szlcsc.com/upload/public/pdf/source/20200306/C422600_1E6D84923E4A46A82E41ADD87F860B5C.pdf, Device=0402WGF1000TCE, Manufacturer Part=0402WGF1000TCE, Supplier=LCSC, Supplier Footprint=0402, Supplier Part=C25076, Symbol=0402WGF1000TCE, Type=厚膜电阻
R53: library part 0402WGF2202TCE, "电阻22K", JLCPCB Part Class="Basic Part", LCSC Part Name="47kΩ ±1% 62.5mW 厚膜电阻", Manufacturer=UNI-ROYAL(厚声), Manufacturer Part=0402WGF4702TCE, Operating Temperature=-55℃~+155℃, Power(Watts)=62.5mW, Temperature Coefficient=±100ppm/℃, Tolerance=±1%, Voltage-Supply(Max)=50V, Add into BOM=yes, Convert to PCB=yes, Datasheet=https://item.szlcsc.com/datasheet/0402WGF4702TCE/26535.html, Device=0402WGF4702TCE, Supplier=LCSC, Supplier Footprint=0402, Supplier Part=C25792, Symbol=0402WGF4702TCE, Type=厚膜电阻